# Altium PCB JUNORPCDC.PcbDoc (part 1 of 4)
Units mil, origin at the board's own origin, x right, y up, seen from the top; angles counter-clockwise.
Board outline 12224.75 x 6712.94 mil, 12 copper layers (Top Layer, Internal Plane 1, Signal Layer 1, Internal Plane 2, Internal Plane 3, Signal Layer 2, Internal Plane 4, Signal Layer 3, Internal Plane 5, Signal Layer 4, Internal Plane 6, Bottom Layer), stack 101.97 mil thick; 156 components, 400 nets, 1963 pads, 846 vias.
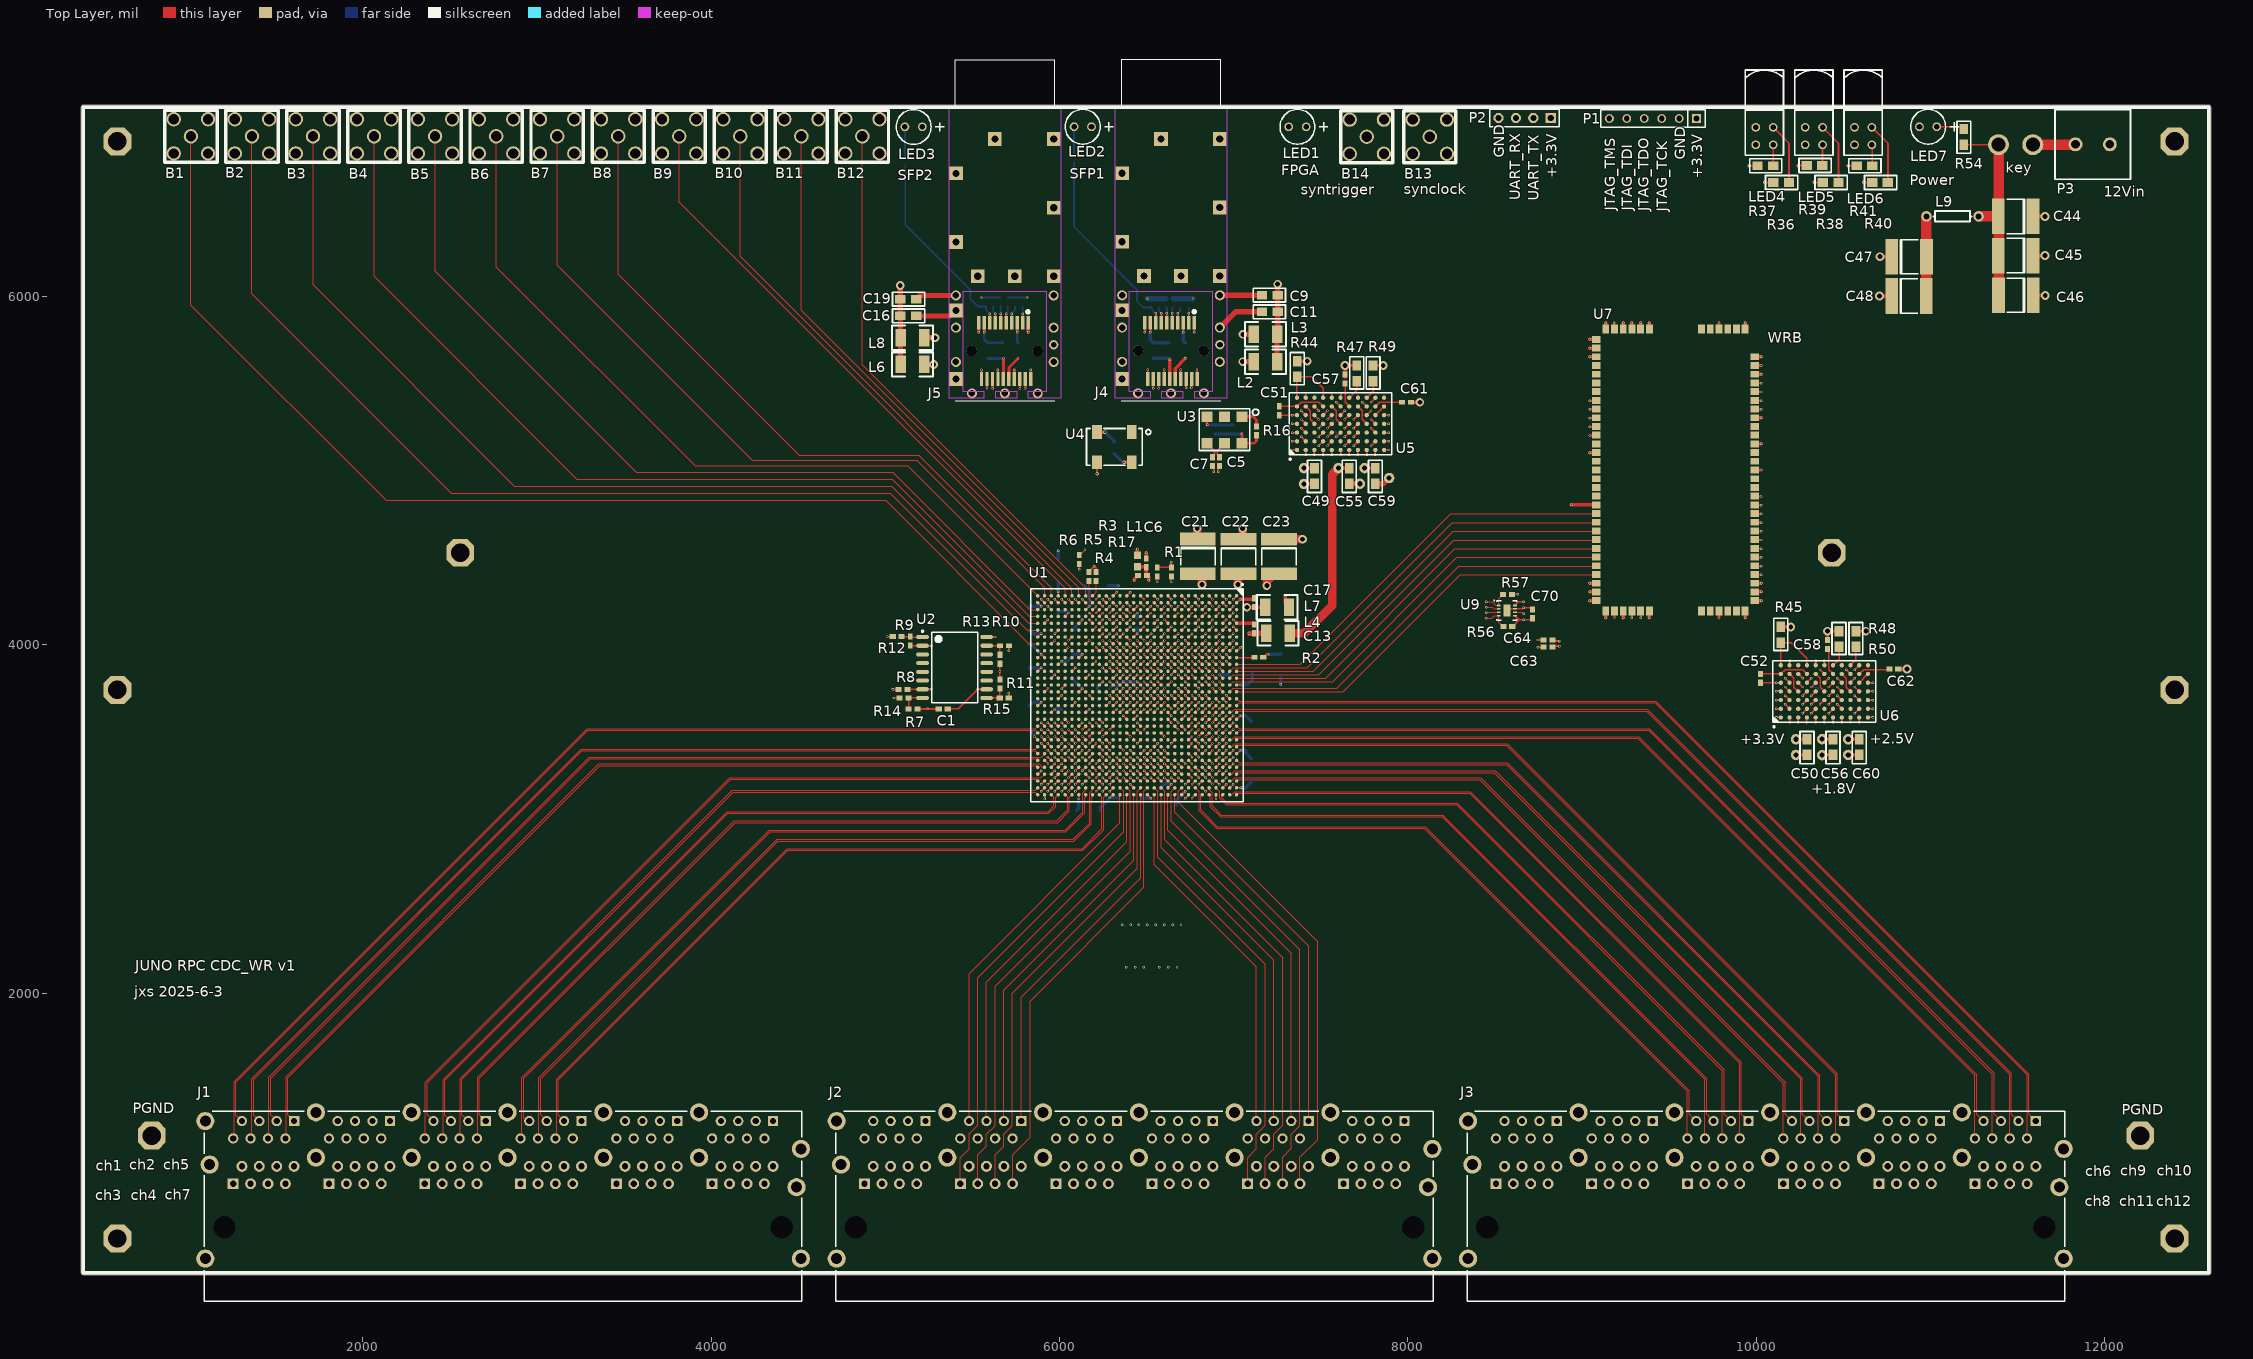
[diagram p0: Top Layer view]
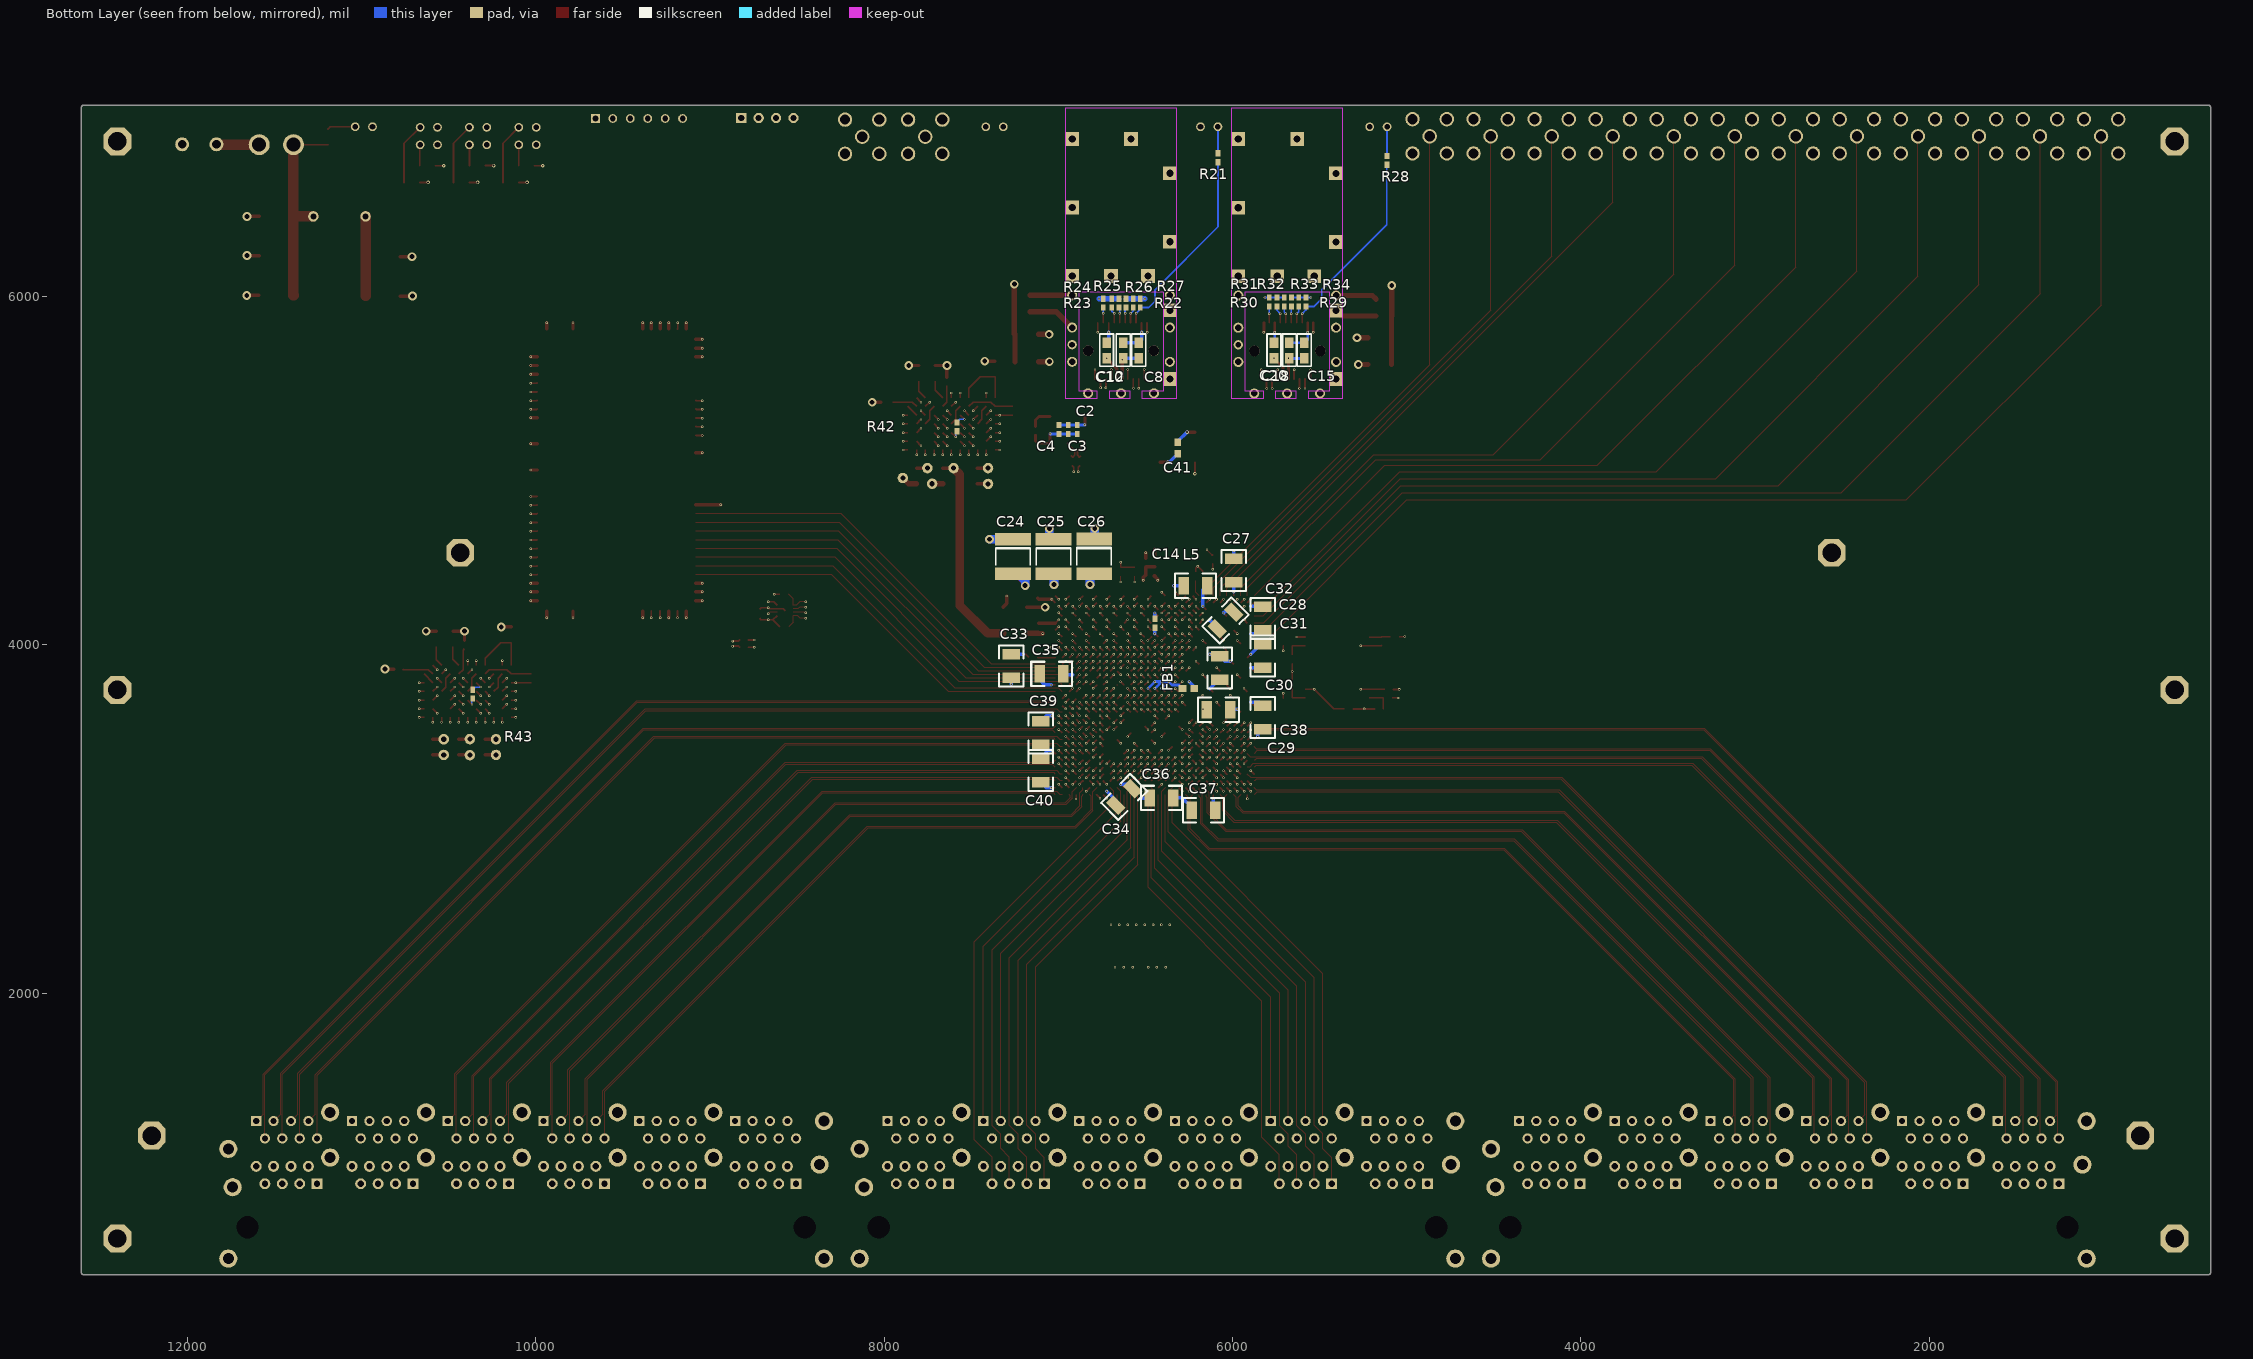
[diagram p1: Bottom Layer view, seen from below]
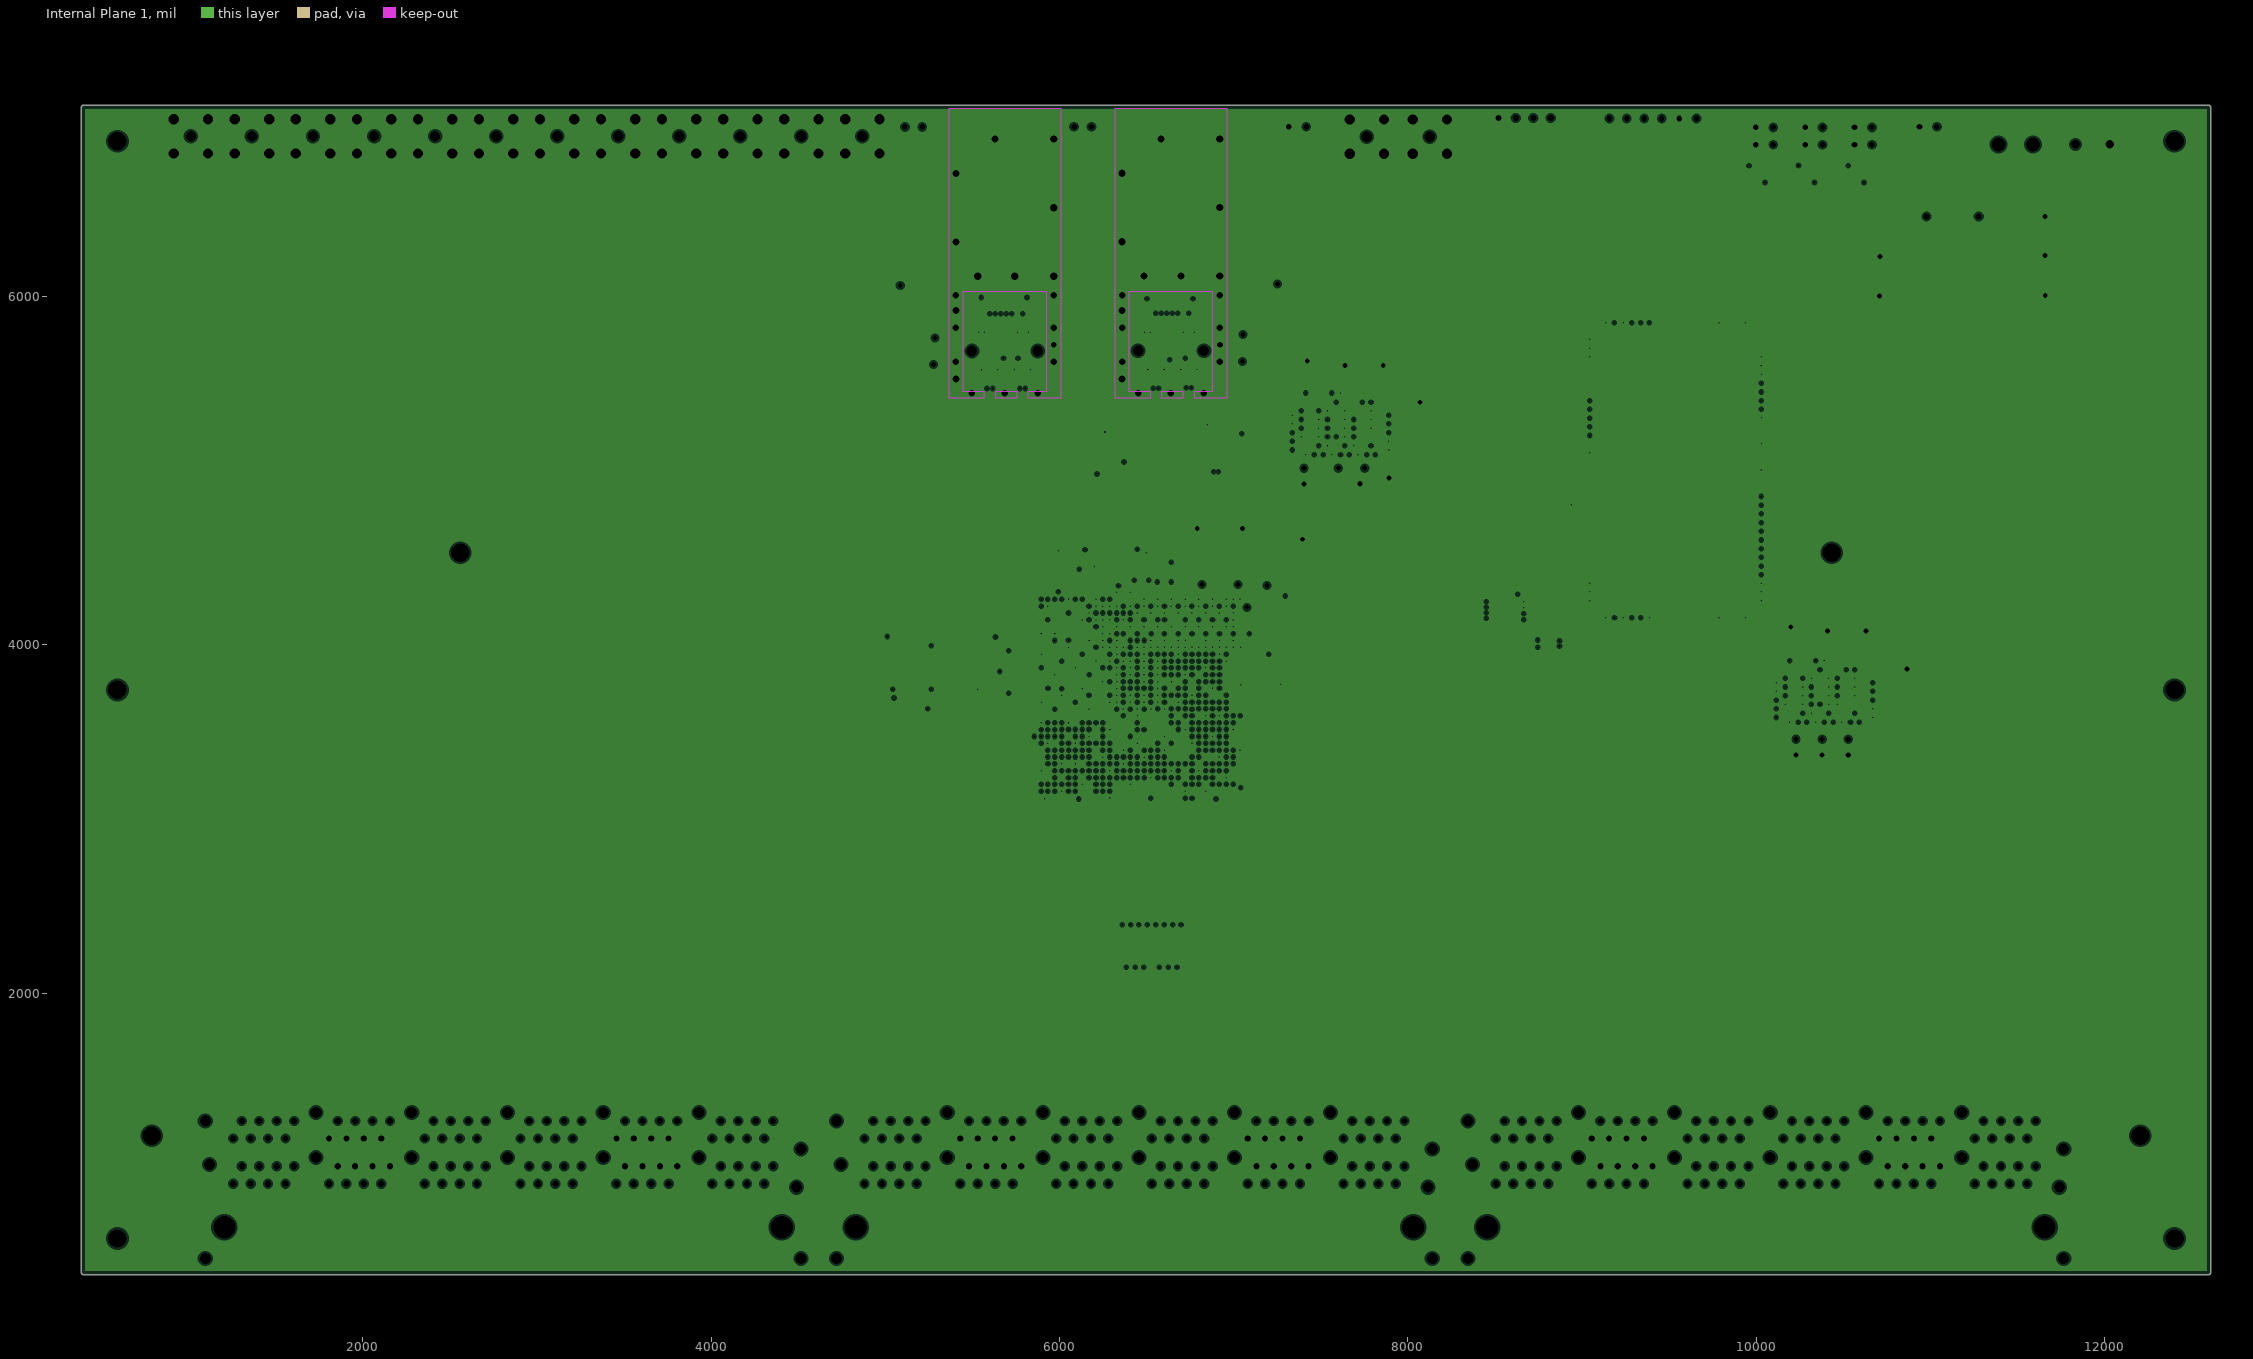
[diagram p2: Internal Plane 1, clearances drawn from the general rule]
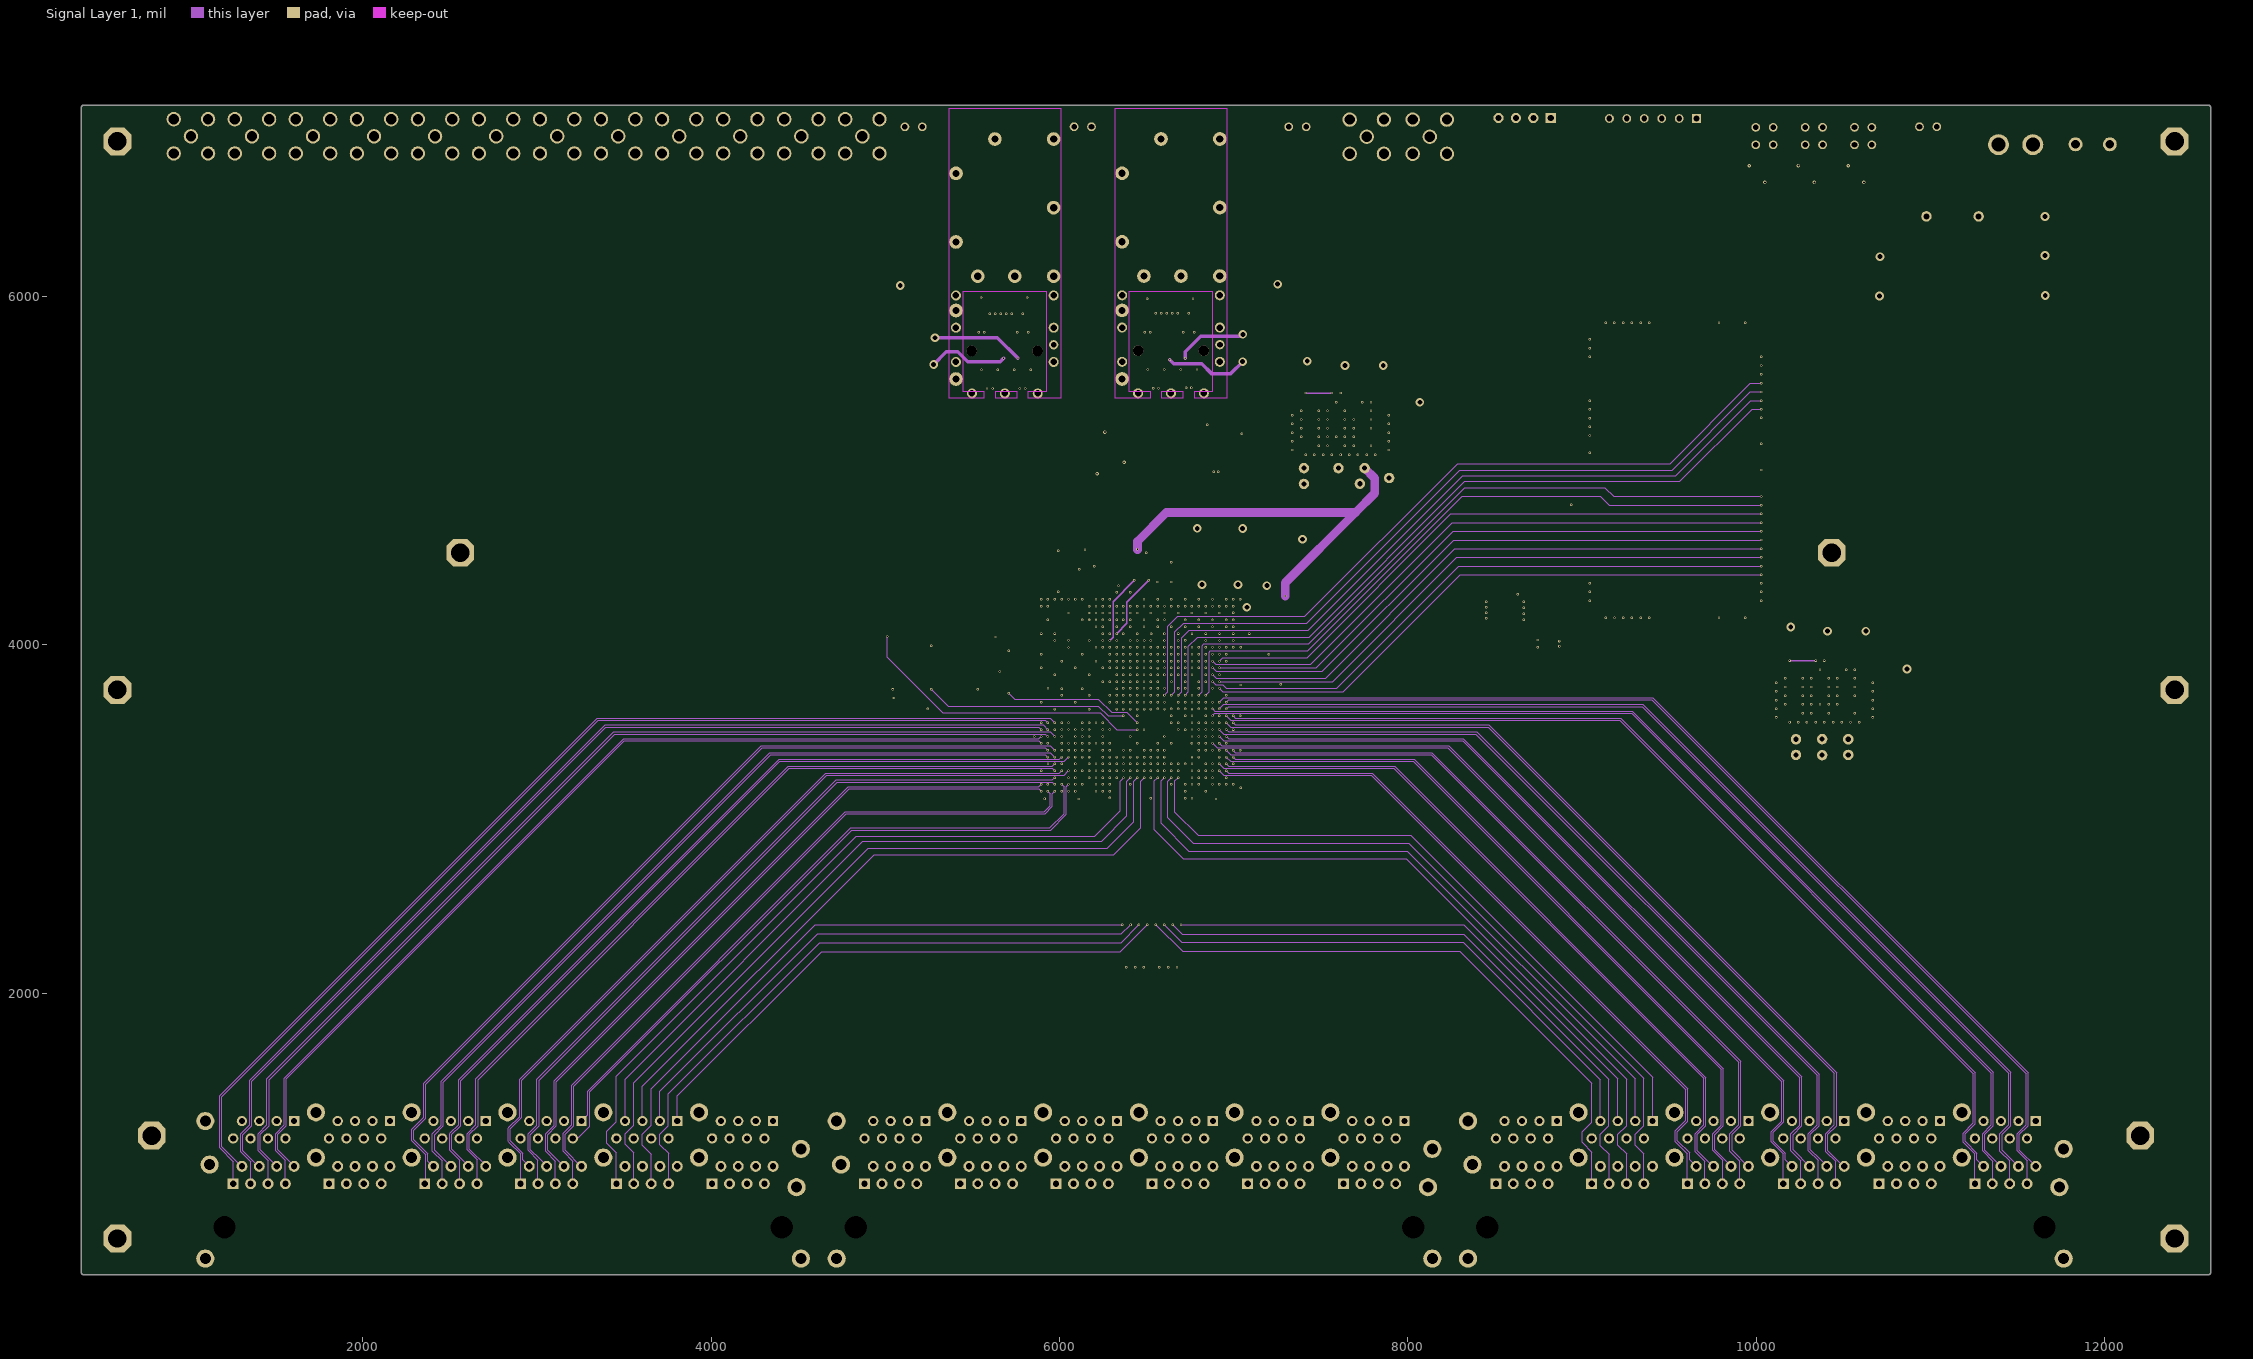
[diagram p3: Signal Layer 1]
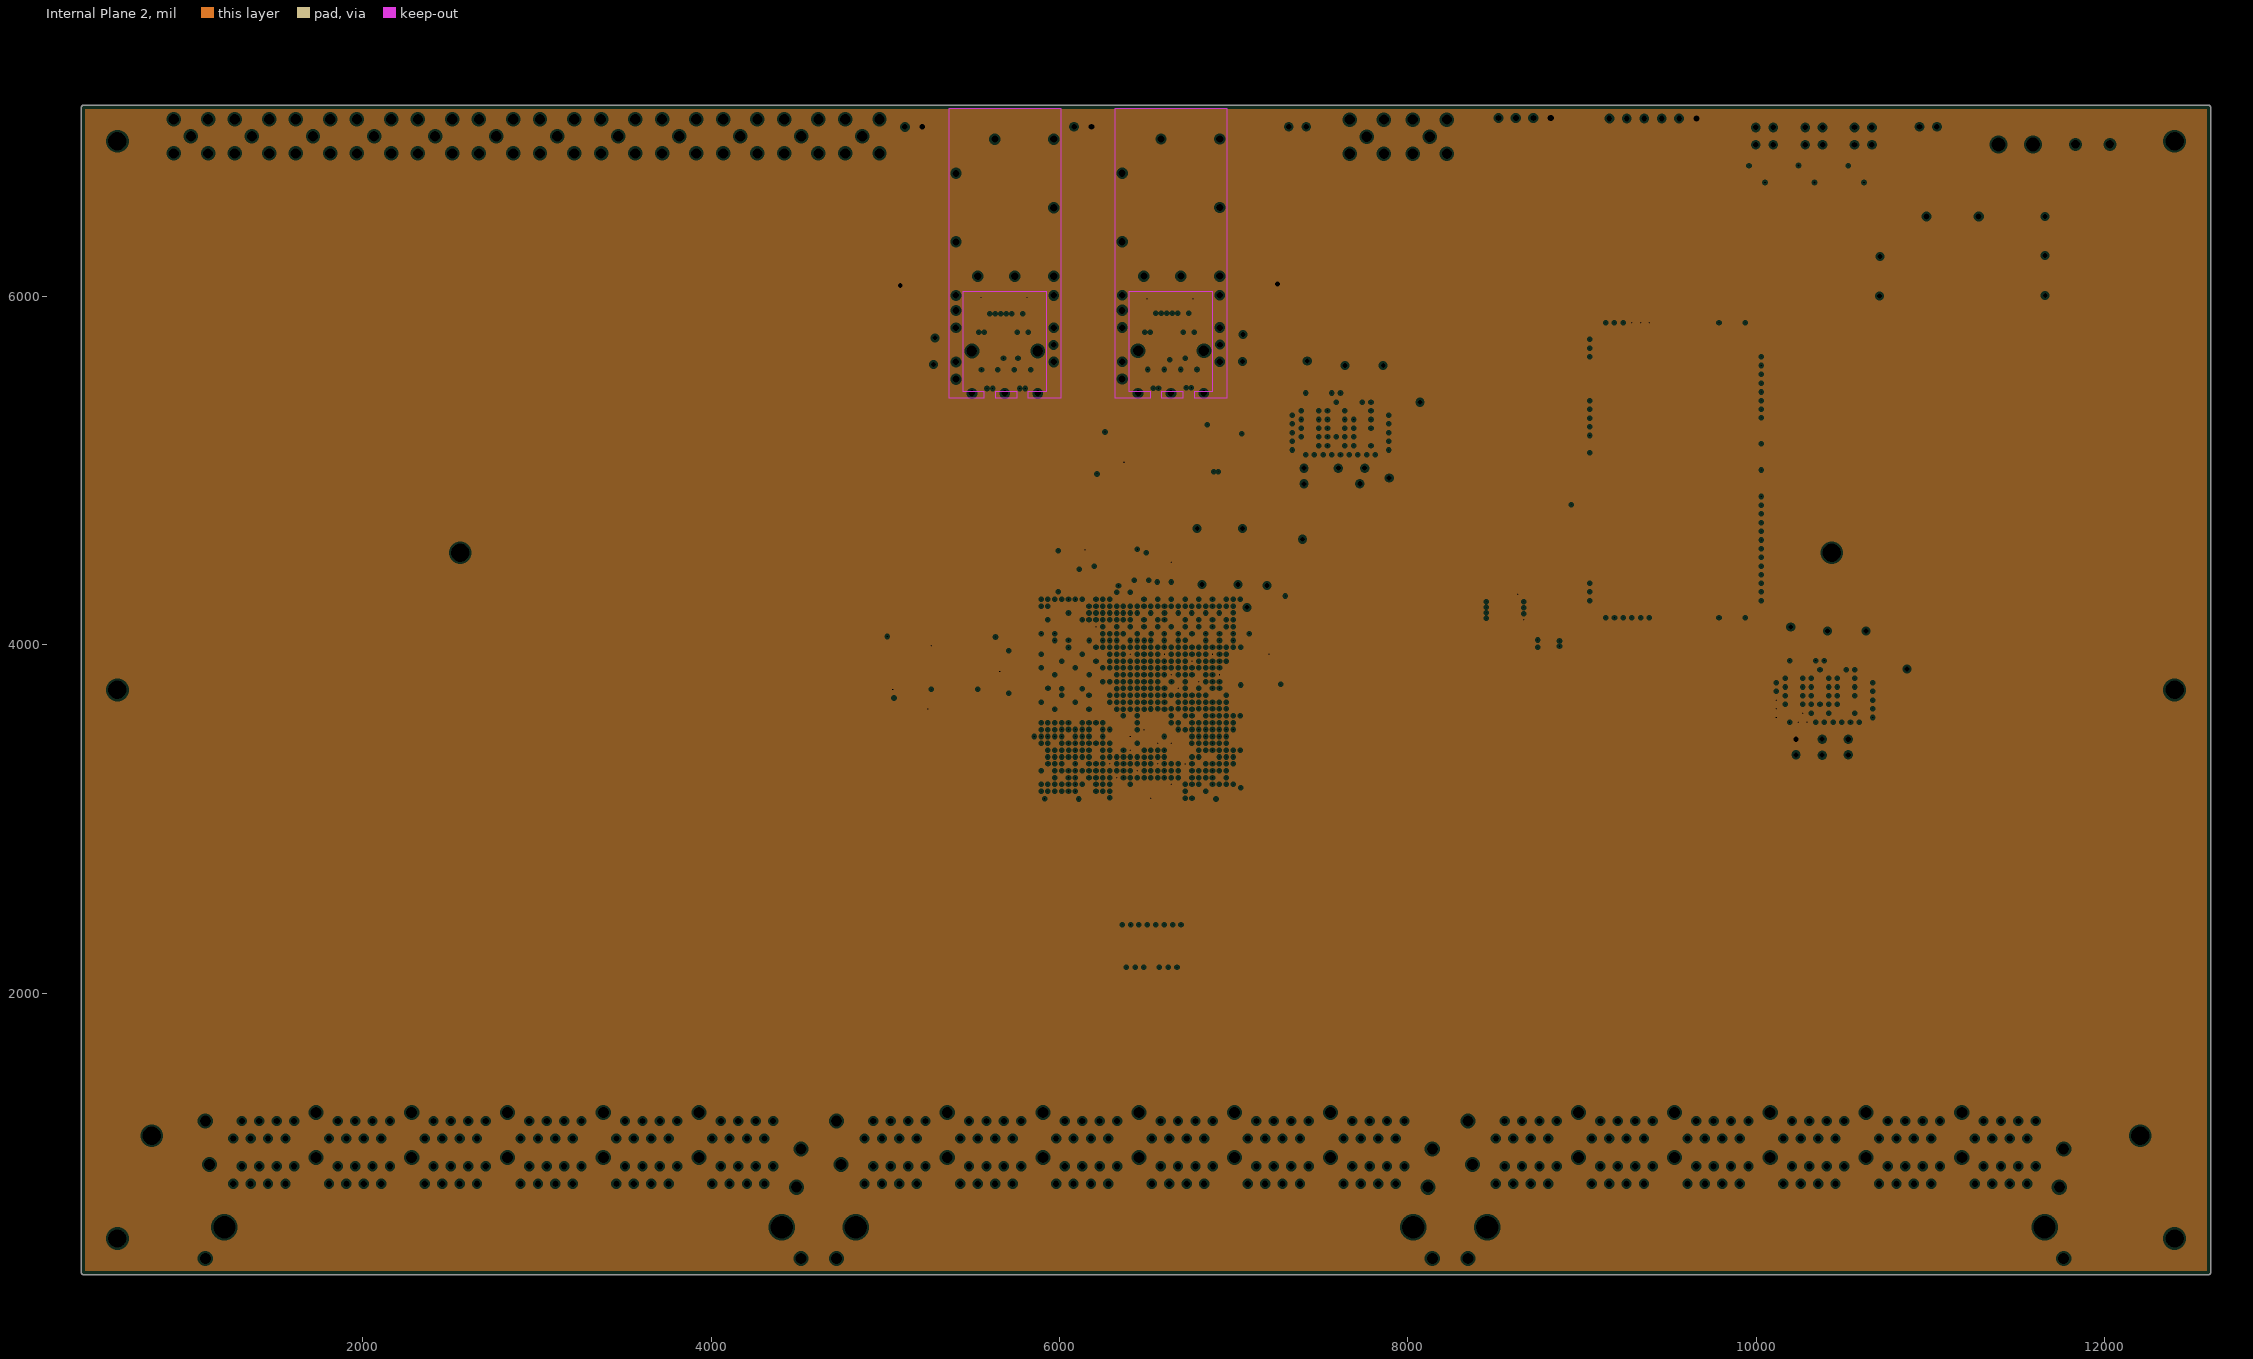
[diagram p4: Internal Plane 2, clearances drawn from the general rule]
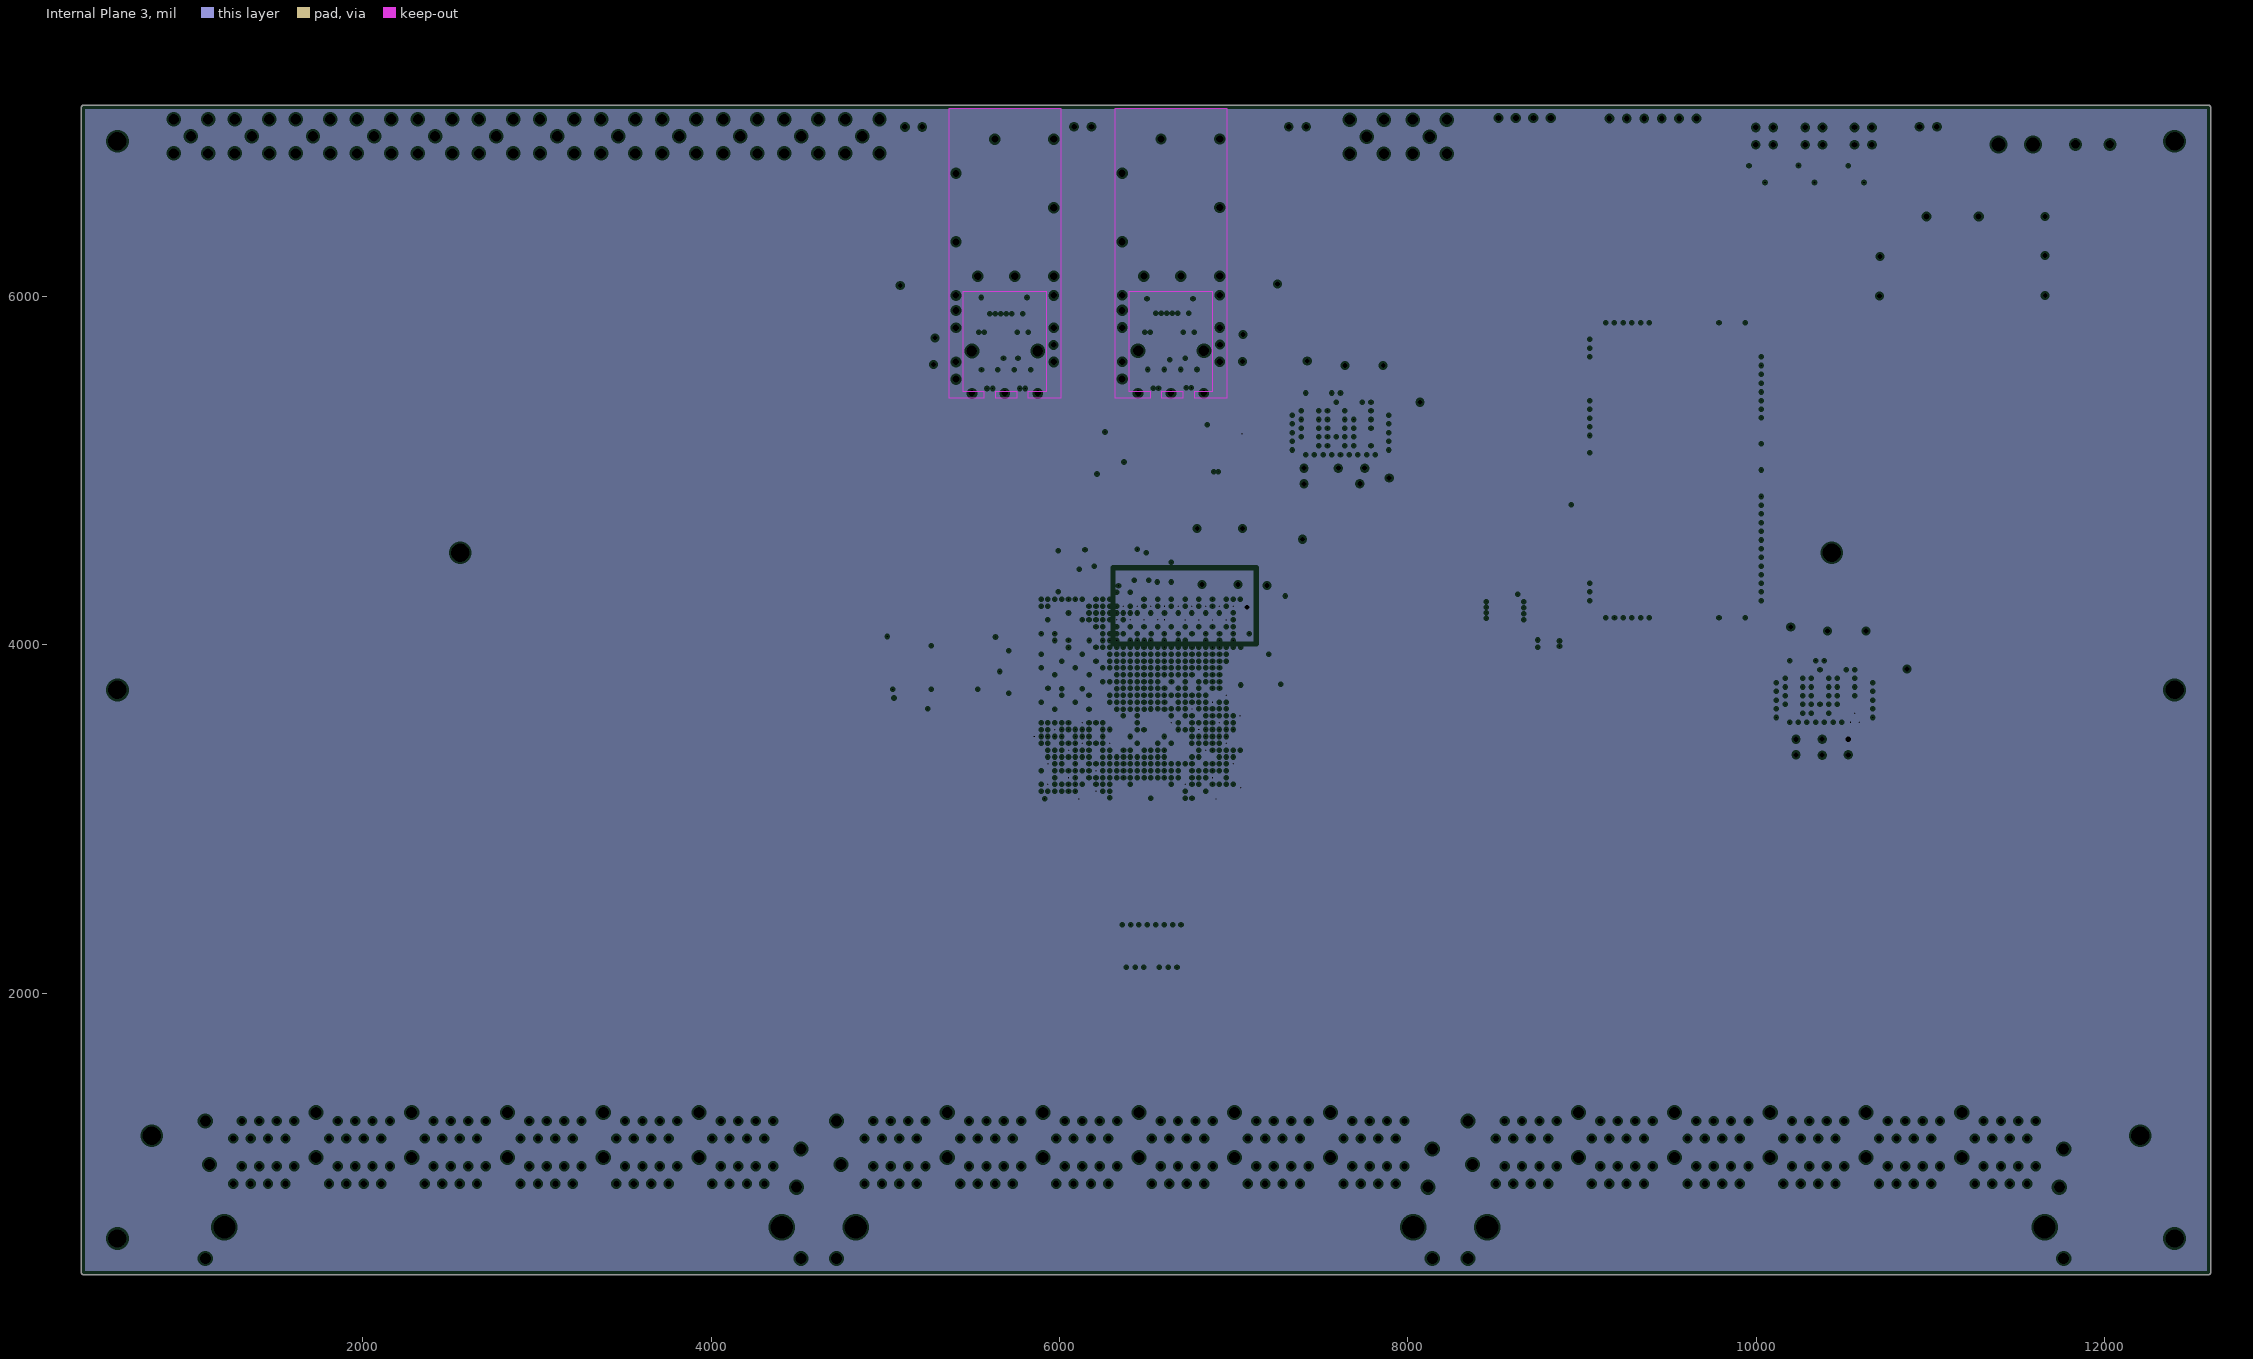
[diagram p5: Internal Plane 3, clearances drawn from the general rule]
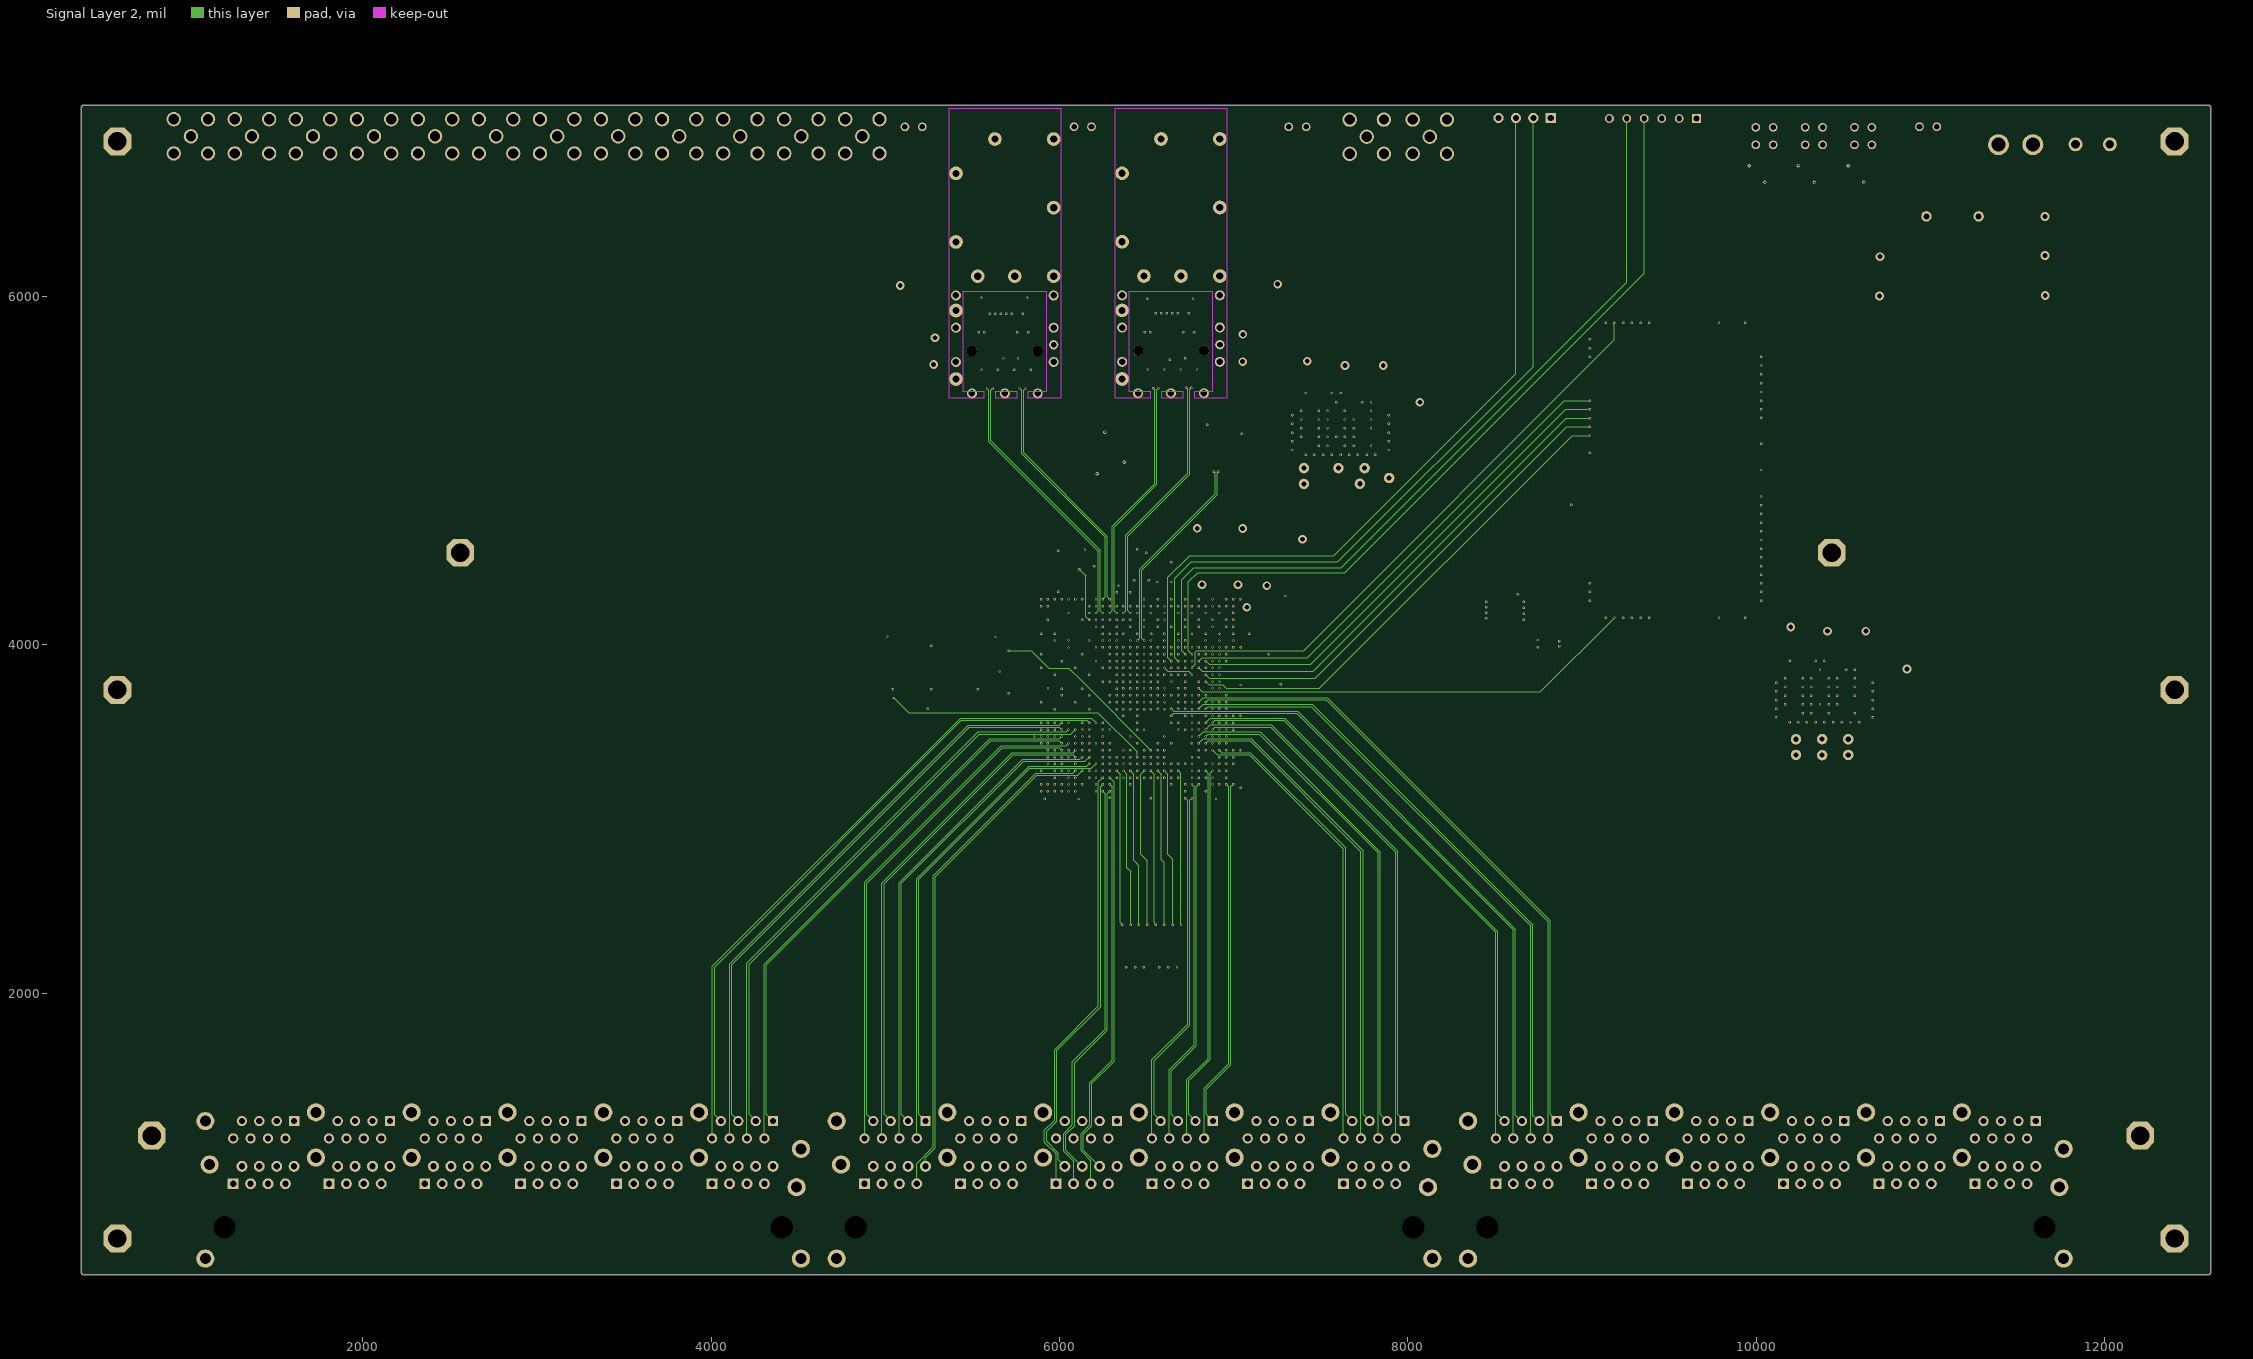
[diagram p6: Signal Layer 2]
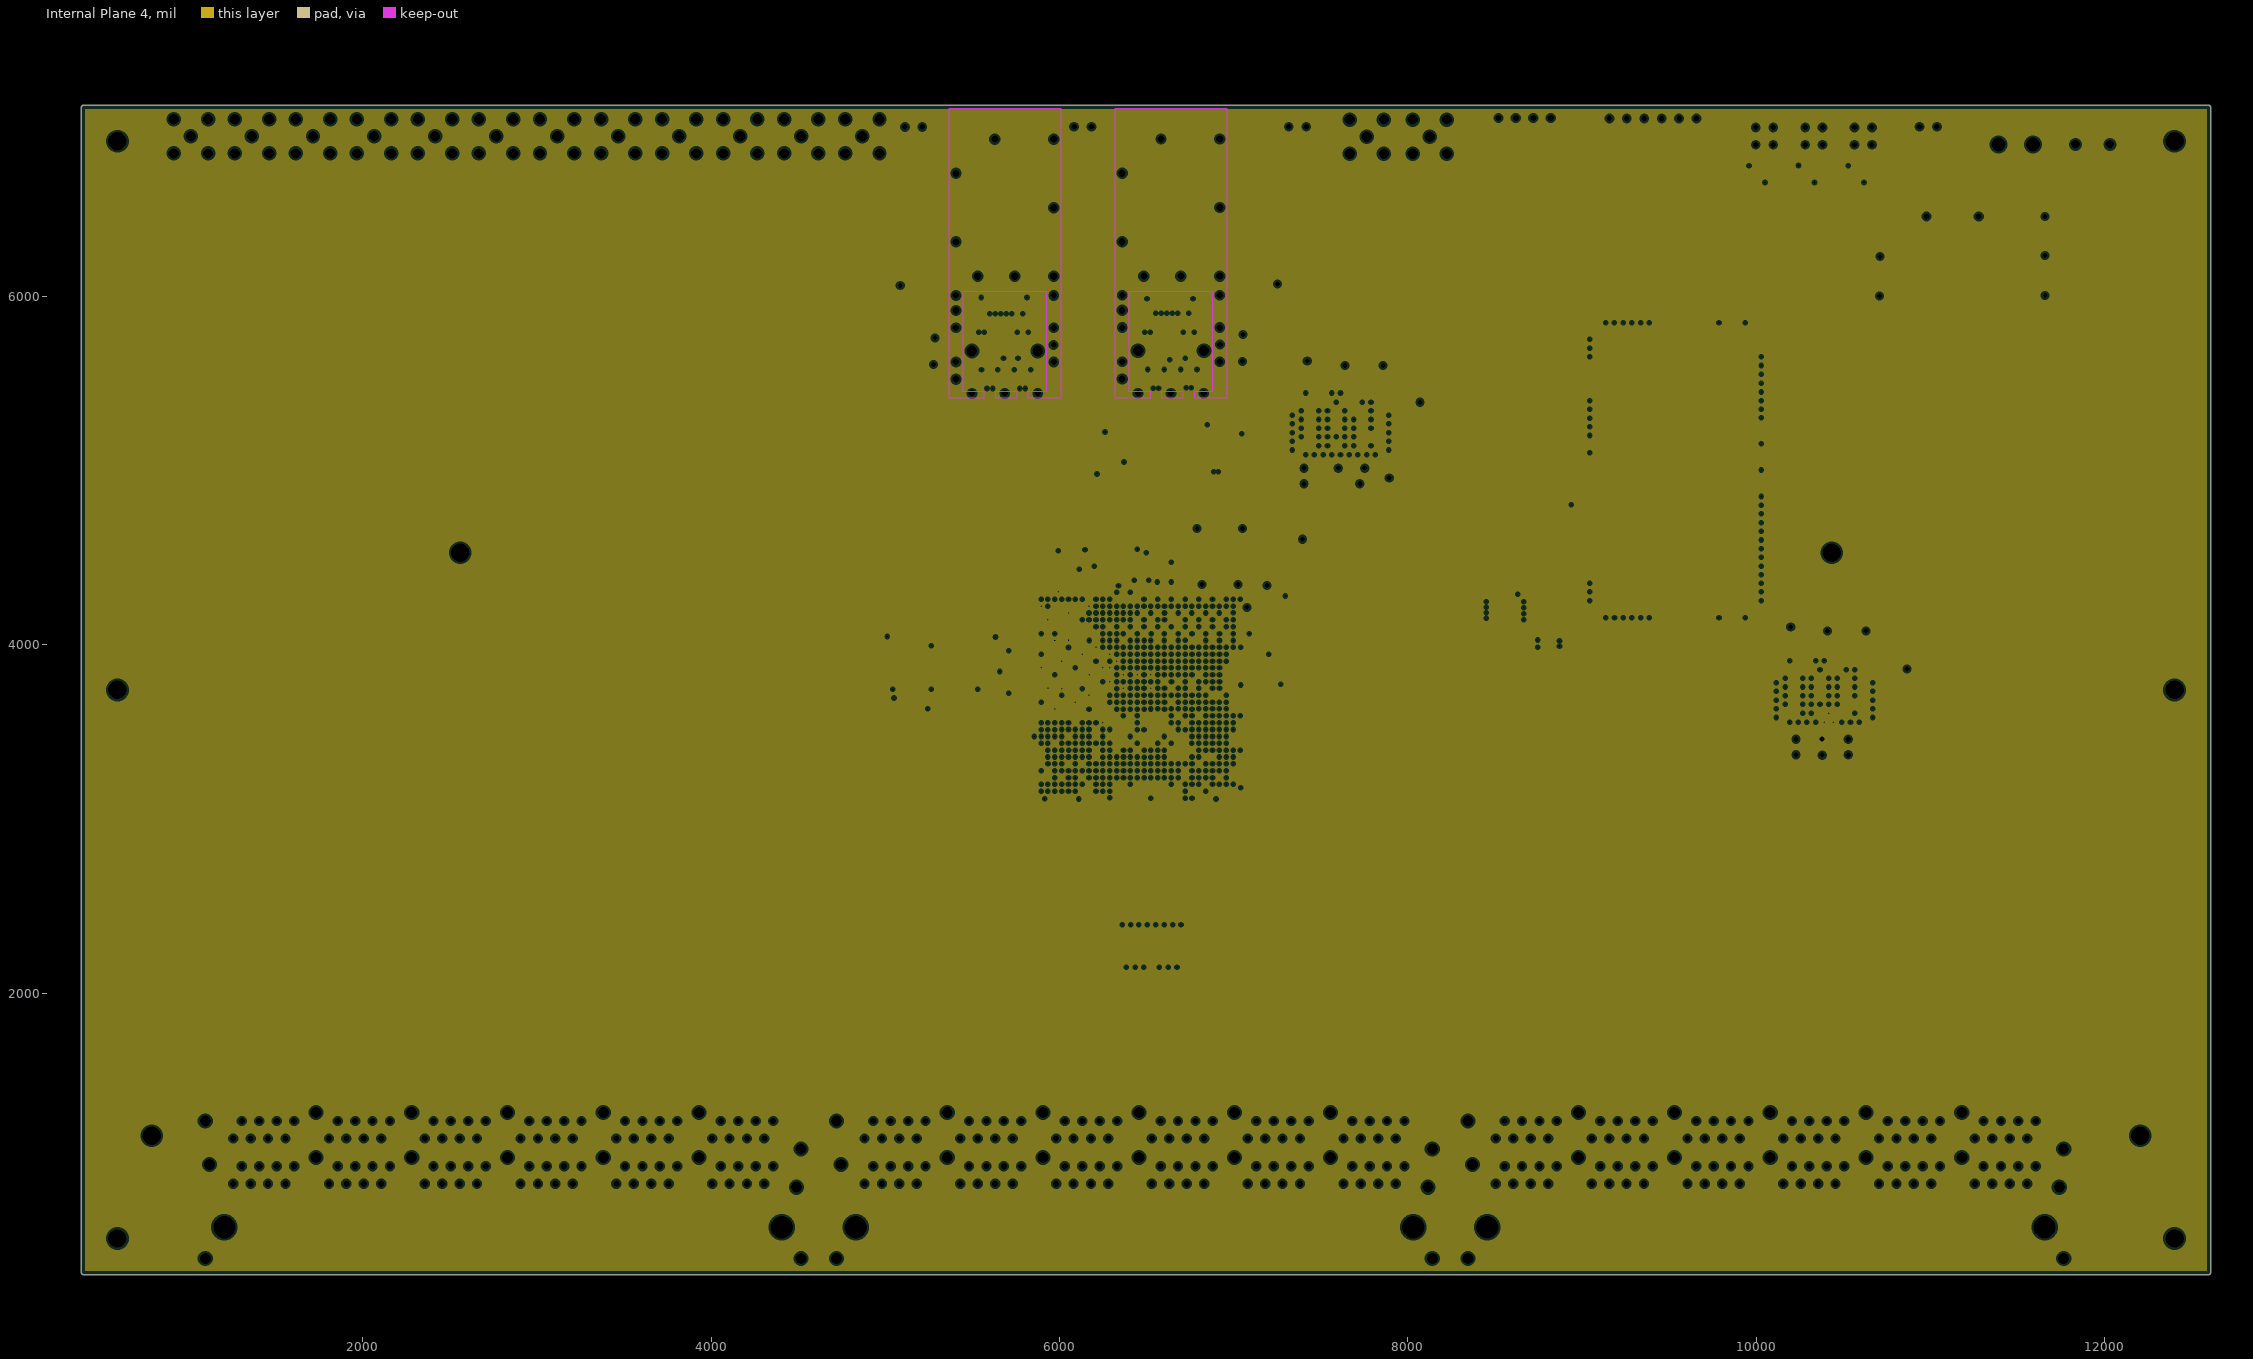
[diagram p7: Internal Plane 4, clearances drawn from the general rule]
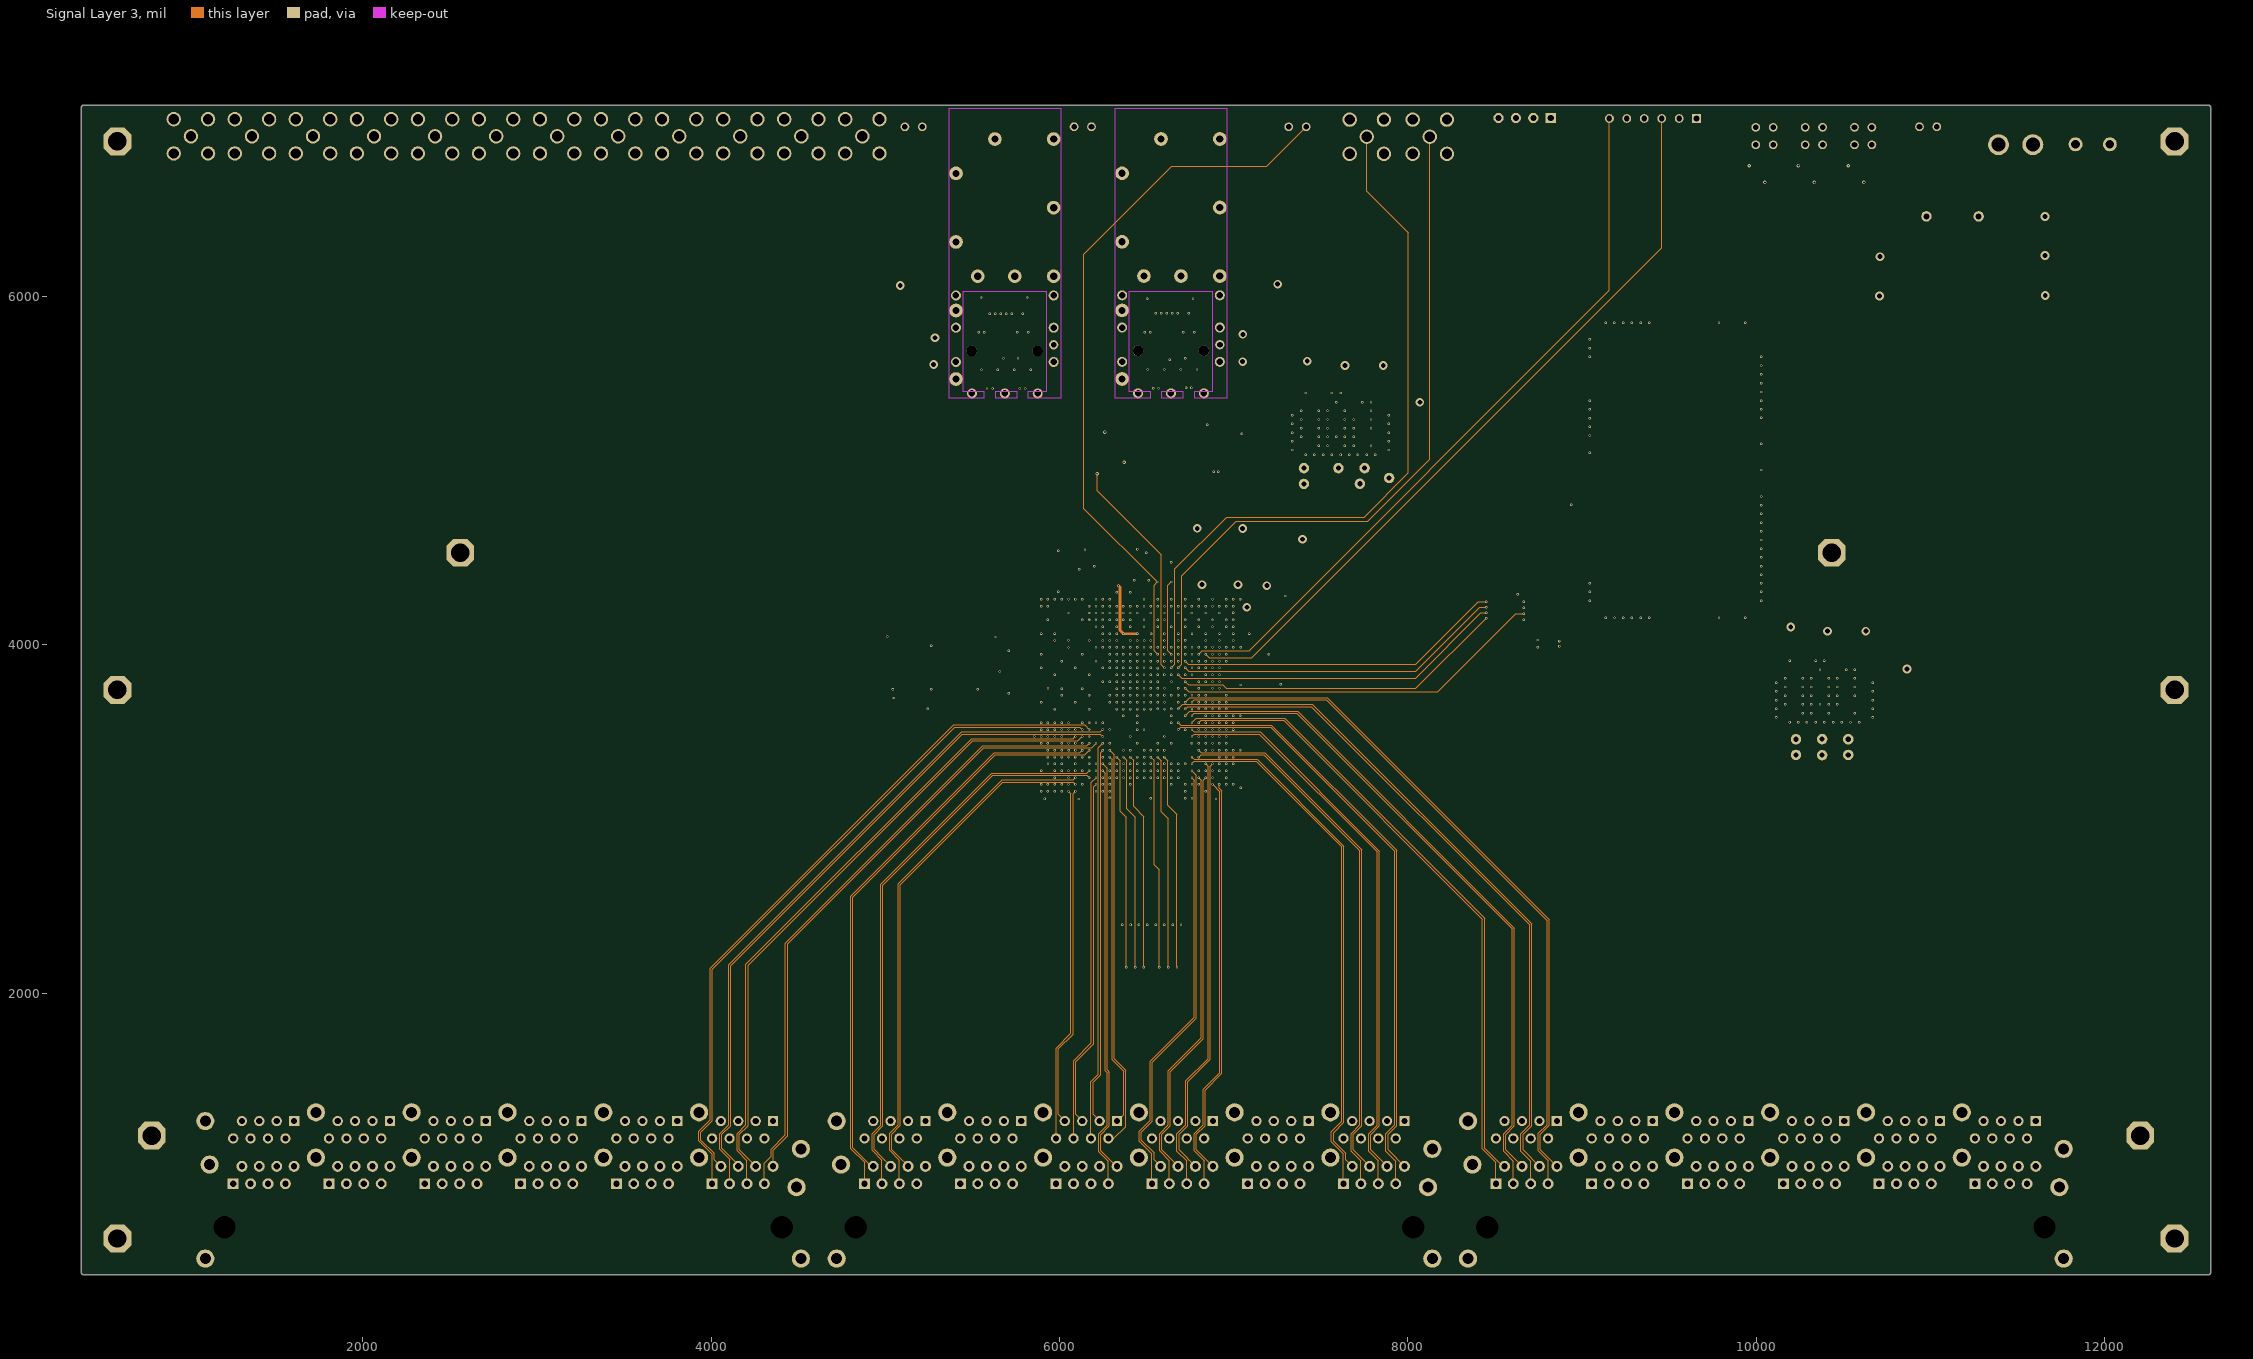
[diagram p8: Signal Layer 3]
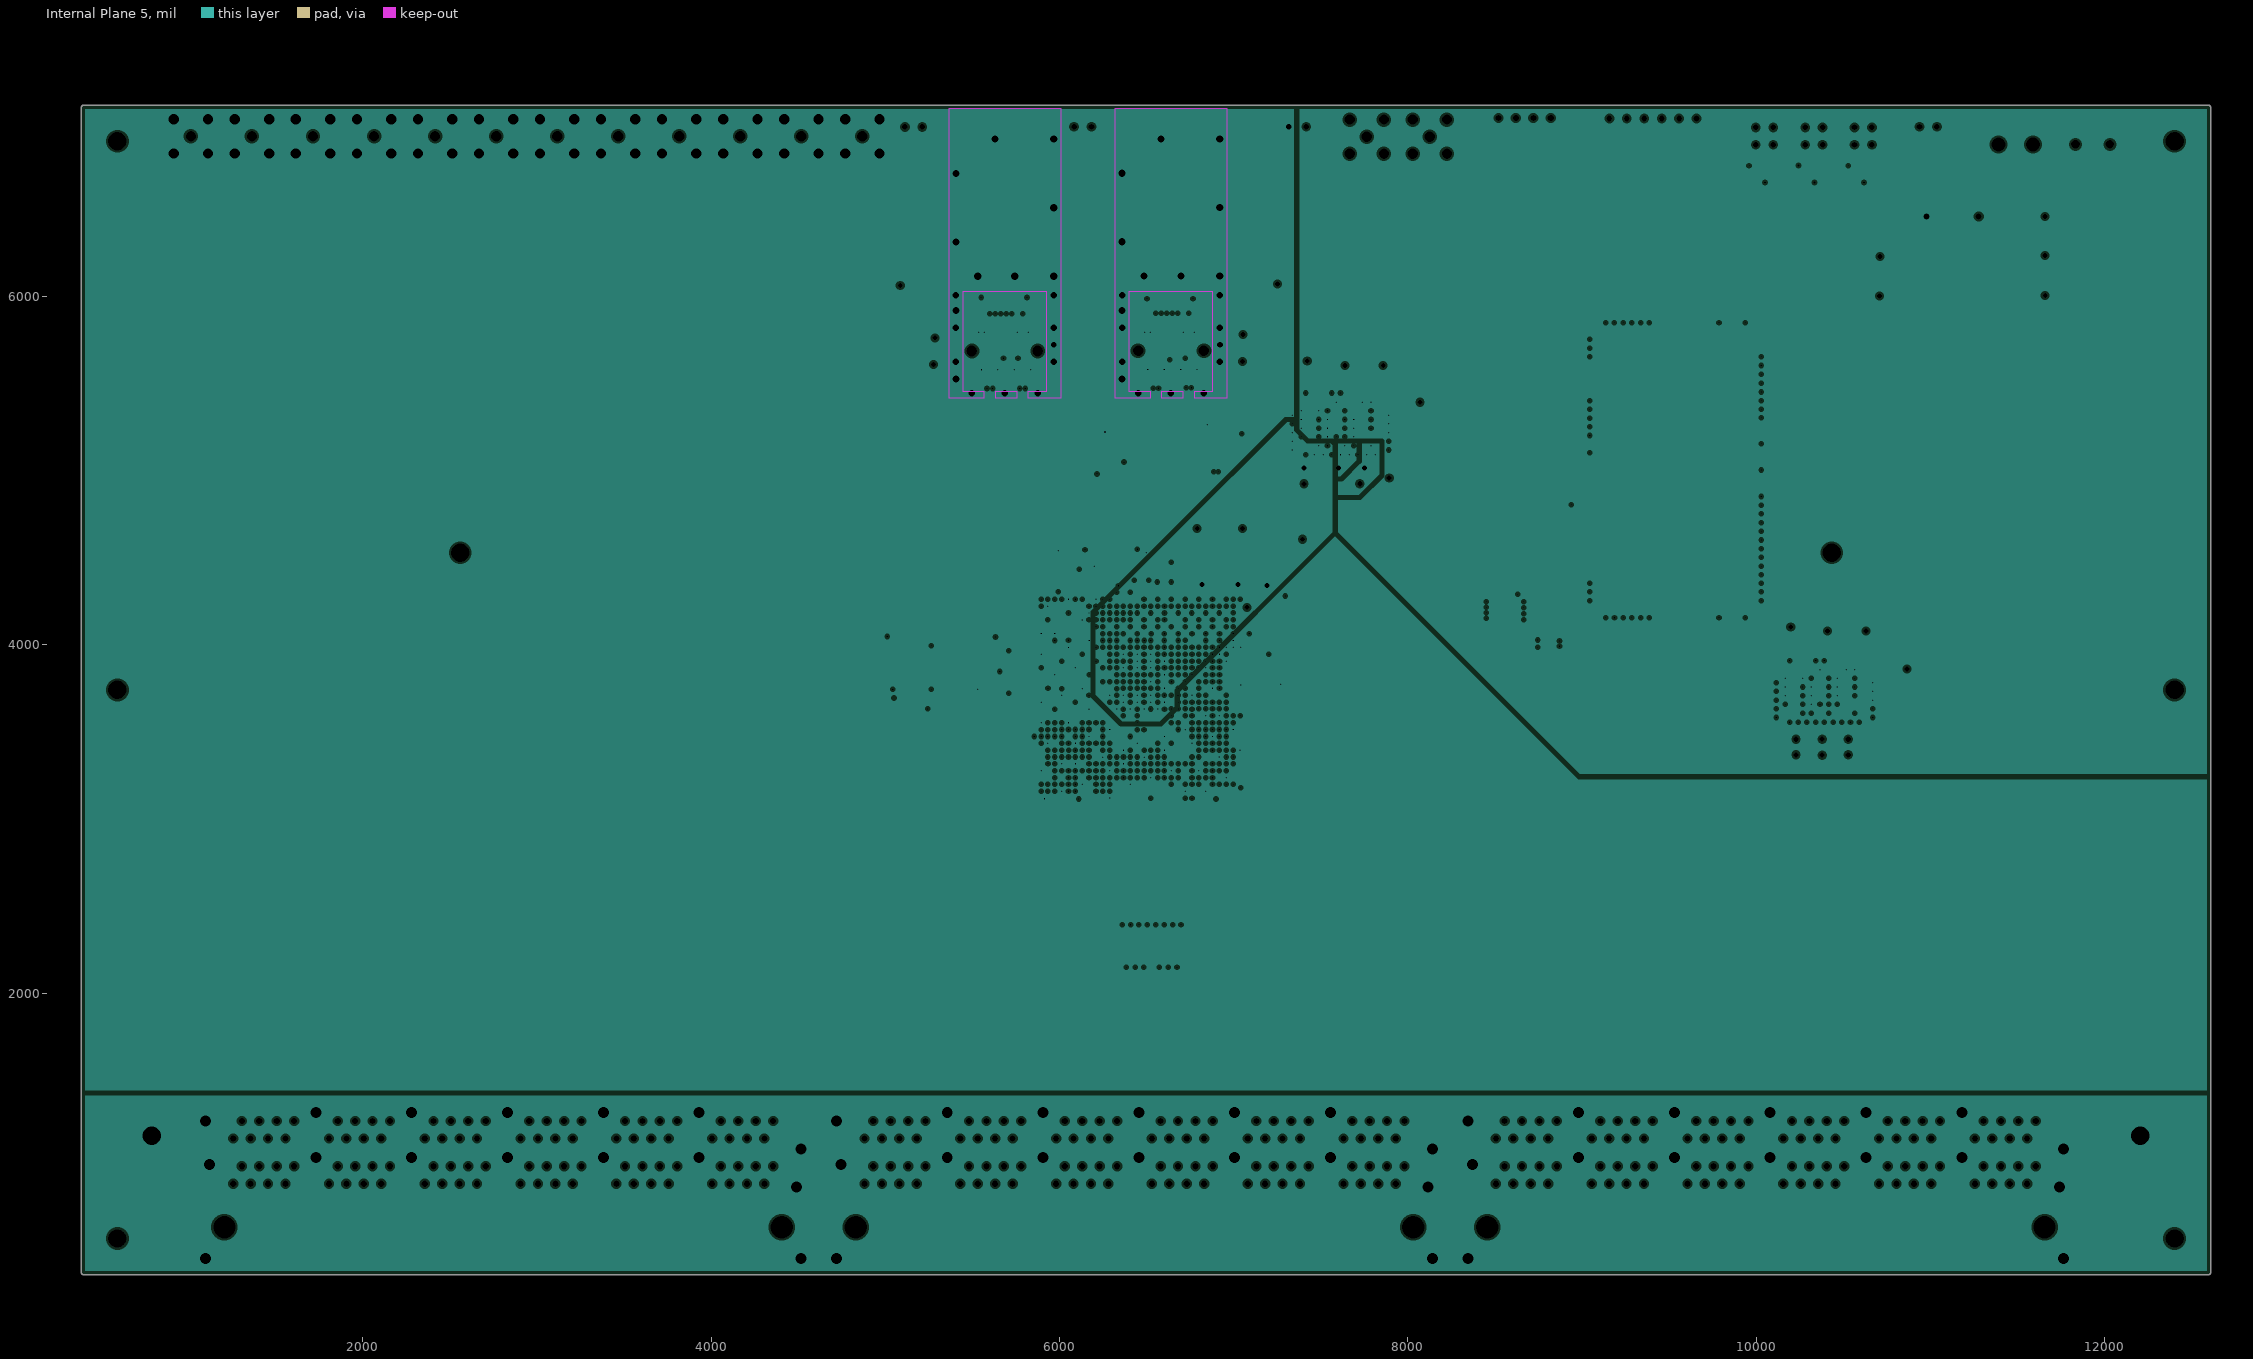
[diagram p9: Internal Plane 5, clearances drawn from the general rule]
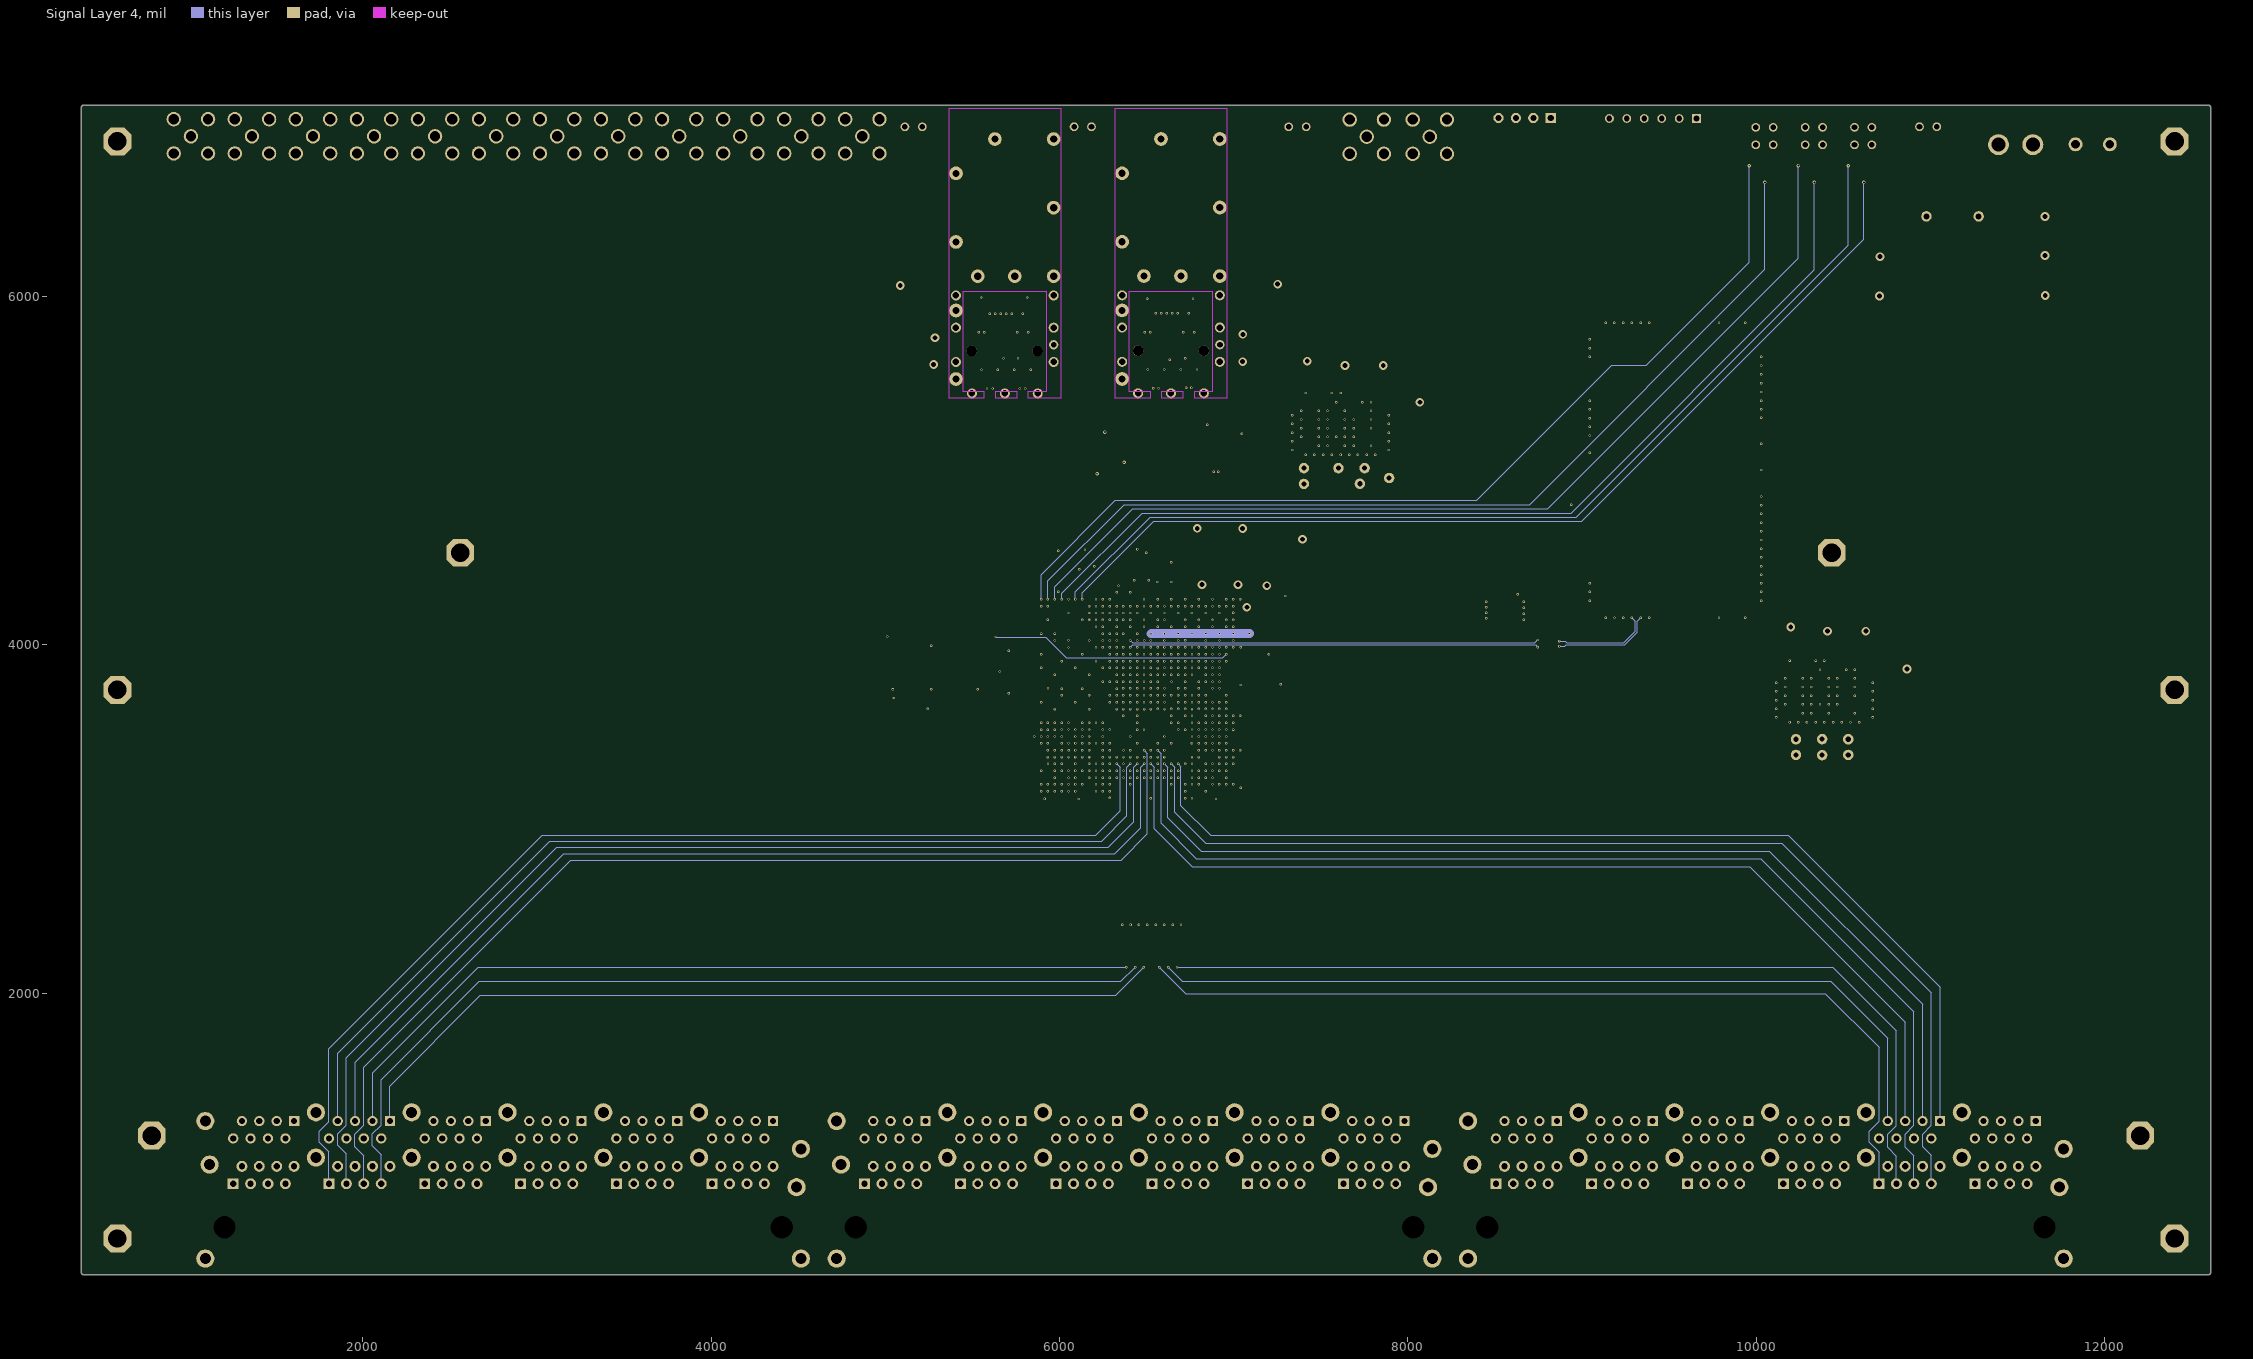
[diagram p10: Signal Layer 4]
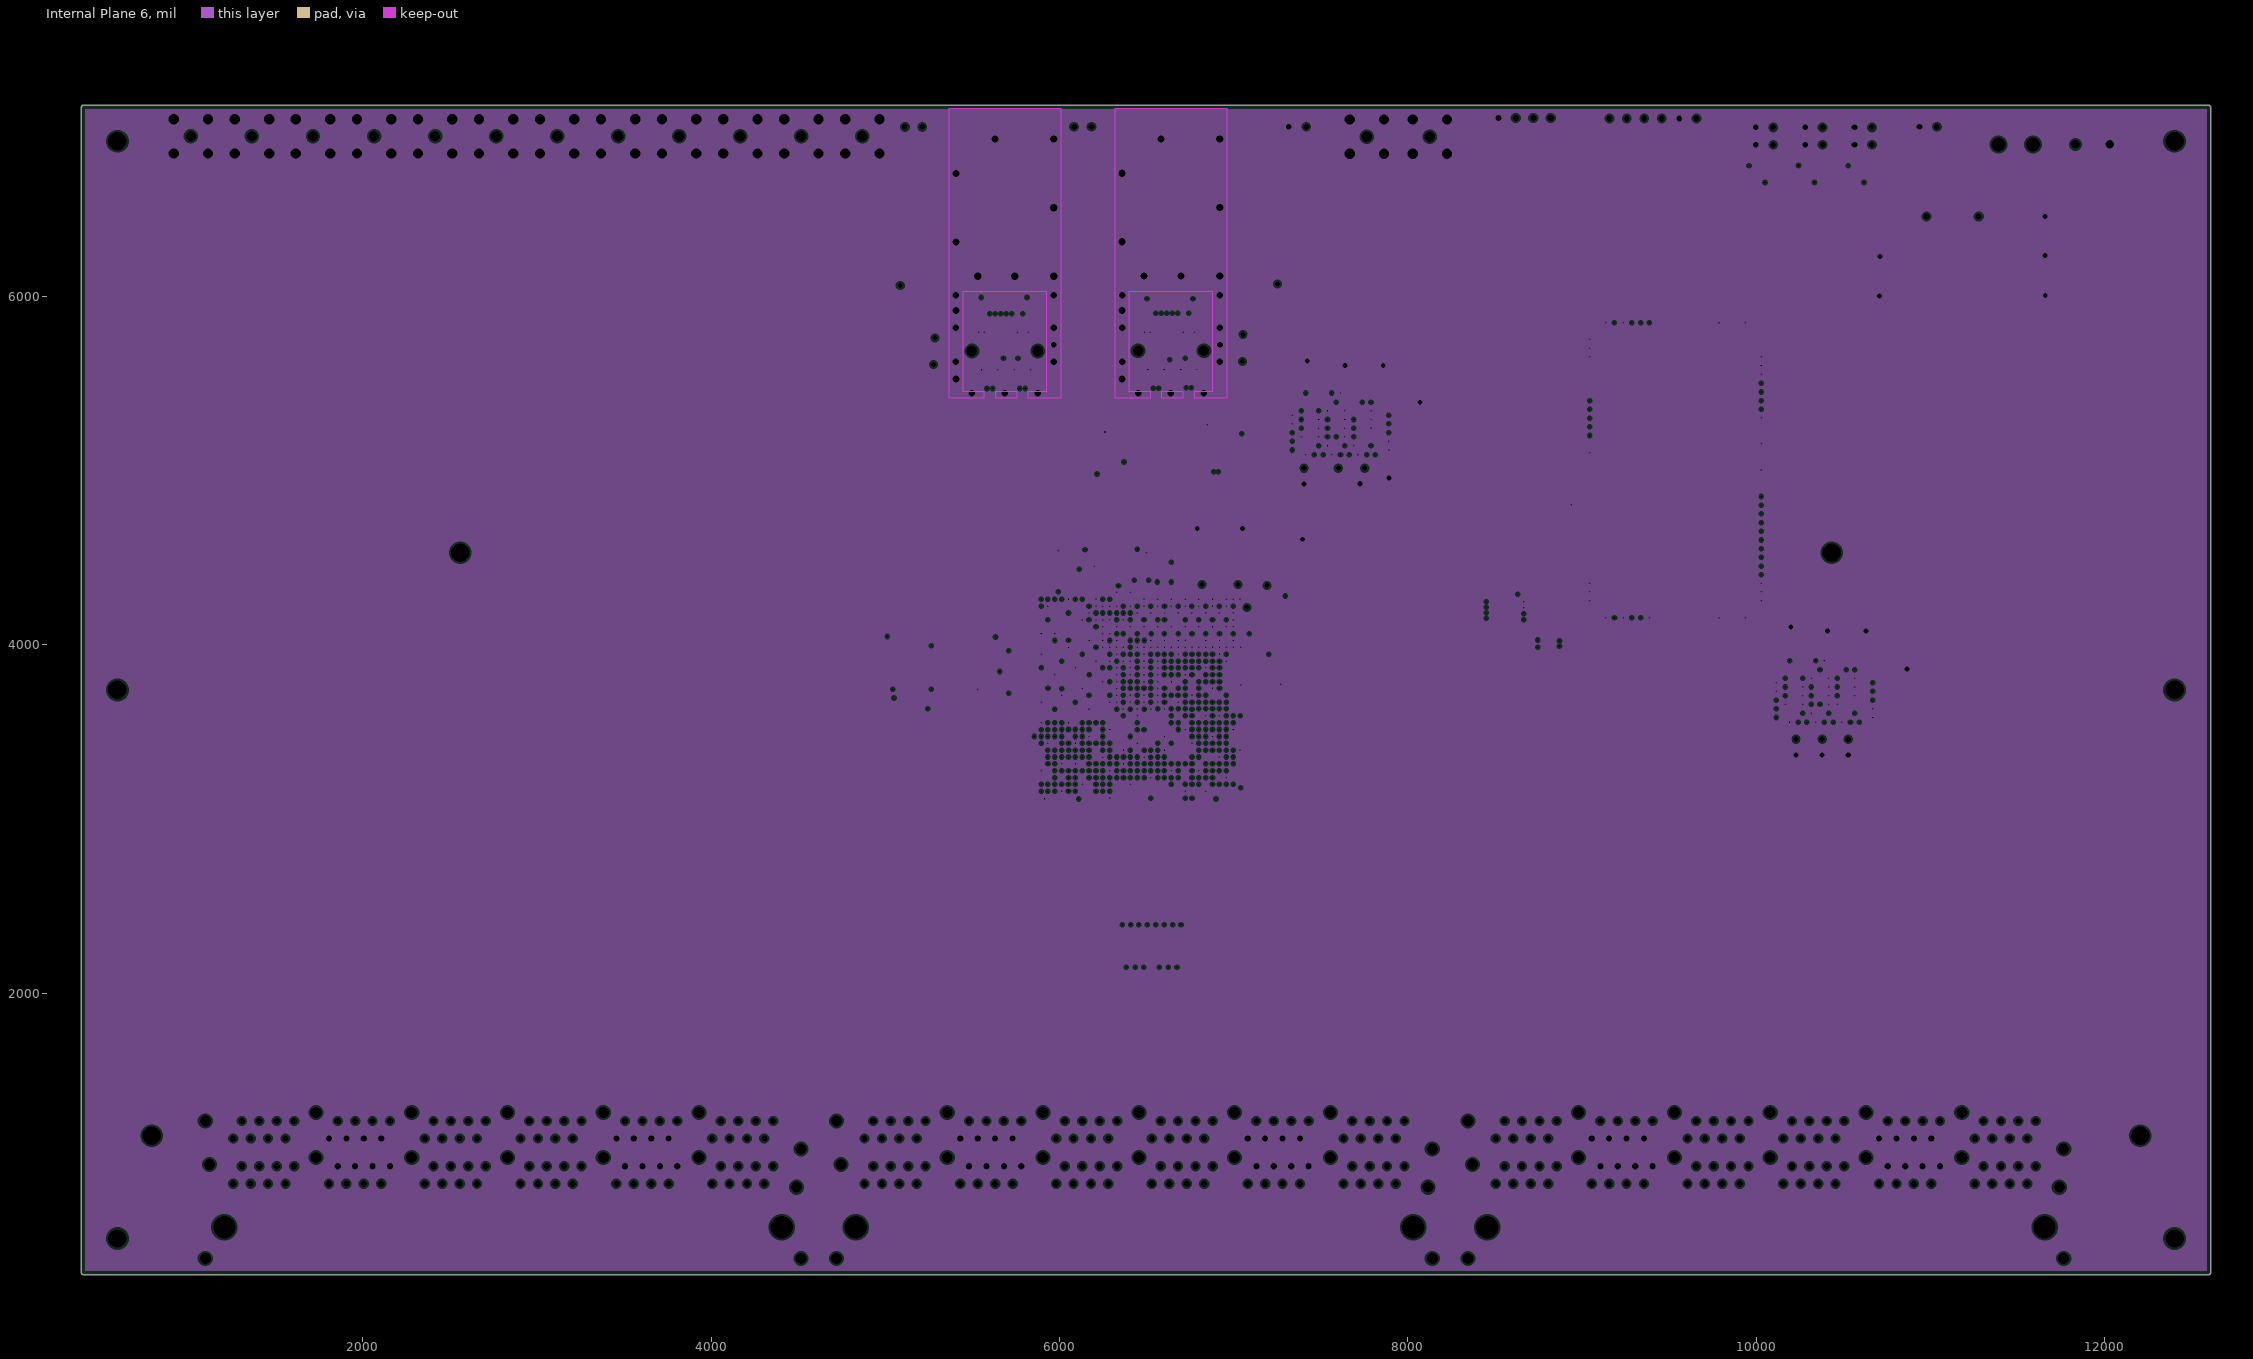
[diagram p11: Internal Plane 6, clearances drawn from the general rule]

## Layer stack, top to bottom
Top Solder: solder mask 0.4, Solder Resist, Dk 3.5
Top Layer: signal copper 1.4
Dielectric 1: core 10, FR-4, Dk 4.2
Internal Plane 1: plane copper 1.417, net GND
Dielectric 3: prepreg 5, Dk 4.2
Signal Layer 1: signal copper 1.417
Dielectric 4: core 10, Dk 4.2
Internal Plane 2: plane copper 1.417, net +3.3Vd
Dielectric 6: prepreg 5, Dk 4.2
Internal Plane 3: plane copper 1.417, net (Multiple Nets)
Dielectric 11: core 10, Dk 4.2
Signal Layer 2: signal copper 1.417
Dielectric 10: prepreg 5, Dk 4.2
Internal Plane 4: plane copper 1.417, net +1.8Vd
Dielectric 12: core 10, Dk 4.2
Signal Layer 3: signal copper 1.417
Dielectric 15: prepreg 5, Dk 4.2
Internal Plane 5: plane copper 1.417, net (Multiple Nets)
Dielectric 16: core 10, Dk 4.2
Signal Layer 4: signal copper 1.417
Dielectric 17: prepreg 5, Dk 4.2
Internal Plane 6: plane copper 1.417, net GND
Dielectric 14: core 10, Dk 4.2
Bottom Layer: signal copper 1.4
Bottom Solder: solder mask 0.4, Solder Resist, Dk 3.5

## Board outline
393.7,383.69 cw(c393.7,393.7) 383.69,393.7 383.69,7086.61 cw(c393.7,7086.61) 393.7,7096.63 12598.43,7096.63 cw(c12598.43,7086.61) 12608.44,7086.61 12608.44,393.7 cw(c12598.43,393.7) 12598.43,383.69

## Design rules (kind name [scope] priority, off if disabled: settings)
Clearance [All] p1: gap=0 ignorepadtopadclearanceinfootprint=FALSE
ComponentClearance [All] p1: gap=0 collisioncheckmode=3 verticalgap=0 showdistances=FALSE
DiffPairsRouting [All] p1: maxlimit=10 minlimit=4 mostfreqgap=8 toplayer_prefgap=6 toplayer_minwidth=4 toplayer_maxwidth=10 toplayer_prefwidth=4 midlayer1_minwidth=4 midlayer1_maxwidth=10 midlayer1_prefwidth=4 midlayer2_minwidth=4 midlayer2_maxwidth=10 midlayer2_prefwidth=4 midlayer3_minwidth=4 midlayer3_maxwidth=10 midlayer3_prefwidth=4 midlayer4_minwidth=4 midlayer4_maxwidth=10 midlayer4_prefwidth=4 bottomlayer_prefgap=6 bottomlayer_minwidth=4 bottomlayer_maxwidth=10 bottomlayer_prefwidth=4 maxuncoupledlength=500
Height [All] p1: minheight=0 maxheight=3937.01 prefheight=500
HoleSize [All] p1: absolutevalues=TRUE maxlimit=300 minlimit=1 maxpercent=80.000 minpercent=20.000
HoleToHoleClearance [All] p1: gap=0 allowstackedmicrovias=TRUE
MinimumSolderMaskSliver [All] p1: minsoldermaskwidth=0
PlaneClearance [All] p1: clearance=12
PlaneConnect [All] p1: planeconnectstyle=Direct reliefexpansion=20 reliefentries=4 reliefconductorwidth=10 reliefairgap=10
PolygonConnect [All] p1: connectstyle=Relief reliefconductorwidth=10 reliefentries=4 polygonreliefangle="90 Angle" airgapwidth=10
RoutingVias [All] p1: holewidth=28 width=50 viastyle="Through Hole" minholewidth=6 minwidth=10 maxholewidth=200 maxwidth=300
SilkToSilkClearance [All] p1: silktosilkclearance=0
SilkToSolderMaskClearance [IsPad] p1: minsilkscreentomaskgap=0 clearancetoexposedcopper=TRUE
SolderMaskExpansion [All] p1: expansion=4
Width [All] p1: maxlimit=100 minlimit=4 preferedwidth=10 minimp=50.000000 maximp=50.000000 favimp=50.000000
20 further rules are at their usual default settings.

## Classes and differential pairs
component class WR: P2 U7
component class power: C44 C45 C46 C47 C48 C49 C50 C51 C52 C55 C56 C57 C58 C59 C60 C61 C62 L9 LED7 P3 R42 R43 R44 R45 R47 R48 R49 R50 R54 U5 U6
component class main: B1 B2 B3 B4 B5 B6 B7 B8 B9 B10 B11 B12 B13 B14 C41 LED4 LED5 LED6 R36 R37 R38 R39 R40 R41 U4
component class K7410tFFG900Power: C21 C22 C23 C24 C25 C26 C27 C28 C29 C30 C31 C32 C33 C34 C35 C36 C37 C38 C39 C40
component class K7410tFFG900MGT: C2 C3 C4 C5 C6 C7 C8 C9 C10 C11 C12 C13 C14 C15 C16 C17 C18 C19 C20 C63 C64 C? J4 J5 L1 L2 L3 L4 L5 L6 L7 L8 LED2 LED3 R16 R17 R21 R22 R23 R24 R25 R26 R27 R28 R29 R30 R31 R32 R33 R34 R51 U3
component class K7410tFFG900HR: U1
component class K7410tFFG900Aux: C1 C70 FB1 LED1 P1 R1 R2 R3 R4 R5 R6 R7 R8 R9 R10 R11 R12 R13 R14 R15 R56 R57 U2 U9
component class input: J1 J2 J3
differential pair GTP_REFCLK_CML: +GTP_REFCLK_CML_P -GTP_REFCLK_CML_N
differential pair FTDI11_LVDS25: +FTMS11_LVDS25_P -FTMS11_LVDS25_N
differential pair SFP2TX: +SFP2TX_P -SFP2TX_N
differential pair SFP2RX: +SFP2RX_P -SFP2RX_N
differential pair SFP1TX: +SFP1TX_P -SFP1TX_N
differential pair SFP1RX: +SFP1RX_P -SFP1RX_N
differential pair RESET12_LVDS25: +DATA12_LVDS25_P -DATA12_LVDS25_N
differential pair RESET11_LVDS25: +DATA11_LVDS25_P -DATA11_LVDS25_N
differential pair RESET10_LVDS25: +RESET10_LVDS25_P -RESET10_LVDS25_N
differential pair RESET9_LVDS25: +RESET9_LVDS25_P -RESET9_LVDS25_N
differential pair RESET8_LVDS25: +DATA8_LVDS25_P -DATA8_LVDS25_N
differential pair RESET7_LVDS25: +DATA7_LVDS25_P -DATA7_LVDS25_N
differential pair RESET6_LVDS25: +RESET6_LVDS25_P -RESET6_LVDS25_N
differential pair RESET5_LVDS25: +RESET5_LVDS25_P -RESET5_LVDS25_N
differential pair RESET4_LVDS25: +DATA4_LVDS25_P -DATA4_LVDS25_N
differential pair RESET3_LVDS25: +DATA3_LVDS25_P -DATA3_LVDS25_N
differential pair RESET2_LVDS25: +RESET2_LVDS25_P -RESET2_LVDS25_N
differential pair RESET1_LVDS25: +RESET1_LVDS25_P -RESET1_LVDS25_N
differential pair MGTrefclk_LVDS25: +MGTrefclk_LVDS25_P -MGTrefclk_LVDS25_N
differential pair MGTrefclk_CML: +MGTrefclk_CML_P -MGTrefclk_CML_N
differential pair GTP_REFCLK_LVDS33: +GTP_REFCLK_LVDS33_P -GTP_REFCLK_LVDS33_N
differential pair FTMS12_LVDS25: +FTDI12_LVDS25_P -FTDI12_LVDS25_N
differential pair FTMS11_LVDS25: +FTDI11_LVDS25_P -FTDI11_LVDS25_N
differential pair FTMS10_LVDS25: +FTMS10_LVDS25_P -FTMS10_LVDS25_N
differential pair FTMS9_LVDS25: +FTMS9_LVDS25_P -FTMS9_LVDS25_N
differential pair FTMS8_LVDS25: +FTDI8_LVDS25_P -FTDI8_LVDS25_N
differential pair FTMS7_LVDS25: +FTDI7_LVDS25_P -FTDI7_LVDS25_N
differential pair FTMS6_LVDS25: +FTMS6_LVDS25_P -FTMS6_LVDS25_N
differential pair FTMS5_LVDS25: +FTMS5_LVDS25_P -FTMS5_LVDS25_N
differential pair FTMS4_LVDS25: +FTDI4_LVDS25_P -FTDI4_LVDS25_N
differential pair FTMS3_LVDS25: +FTDI3_LVDS25_P -FTDI3_LVDS25_N
differential pair FTMS2_LVDS25: +FTMS2_LVDS25_P -FTMS2_LVDS25_N
differential pair FTMS1_LVDS25: +FTMS1_LVDS25_P -FTMS1_LVDS25_N
differential pair FTDO12_LVDS25: +FTCK12_LVDS25_P -FTCK12_LVDS25_N
differential pair FTDO11_LVDS25: +FTCK11_LVDS25_P -FTCK11_LVDS25_N
differential pair FTDO10_LVDS25: +FTDO10_LVDS25_P -FTDO10_LVDS25_N
differential pair FTDO9_LVDS25: +FTDO9_LVDS25_P -FTDO9_LVDS25_N
differential pair FTDO8_LVDS25: +FTCK8_LVDS25_P -FTCK8_LVDS25_N
differential pair FTDO7_LVDS25: +FTCK7_LVDS25_P -FTCK7_LVDS25_N
differential pair FTDO6_LVDS25: +FTDO6_LVDS25_P -FTDO6_LVDS25_N
differential pair FTDO5_LVDS25: +FTDO5_LVDS25_P -FTDO5_LVDS25_N
differential pair FTDO4_LVDS25: +FTCK4_LVDS25_P -FTCK4_LVDS25_N
differential pair FTDO3_LVDS25: +FTCK3_LVDS25_P -FTCK3_LVDS25_N
differential pair FTDO2_LVDS25: +FTDO2_LVDS25_P -FTDO2_LVDS25_N
differential pair FTDO1_LVDS25: +FTDO1_LVDS25_P -FTDO1_LVDS25_N
differential pair FTDI12_LVDS25: +FTMS12_LVDS25_P -FTMS12_LVDS25_N
differential pair FTDI10_LVDS25: +FTDI10_LVDS25_P -FTDI10_LVDS25_N
differential pair FTDI9_LVDS25: +FTDI9_LVDS25_P -FTDI9_LVDS25_N
differential pair FTDI8_LVDS25: +FTMS8_LVDS25_P -FTMS8_LVDS25_N
differential pair FTDI7_LVDS25: +FTMS7_LVDS25_P -FTMS7_LVDS25_N
differential pair FTDI6_LVDS25: +FTDI6_LVDS25_P -FTDI6_LVDS25_N
differential pair FTDI5_LVDS25: +FTDI5_LVDS25_P -FTDI5_LVDS25_N
differential pair FTDI4_LVDS25: +FTMS4_LVDS25_P -FTMS4_LVDS25_N
differential pair FTDI3_LVDS25: +FTMS3_LVDS25_P -FTMS3_LVDS25_N
differential pair FTDI2_LVDS25: +FTDI2_LVDS25_P -FTDI2_LVDS25_N
differential pair FTDI1_LVDS25: +FTDI1_LVDS25_P -FTDI1_LVDS25_N
differential pair FTCK12_LVDS25: +FTDO12_LVDS25_P -FTDO12_LVDS25_N
differential pair FTCK11_LVDS25: +FTDO11_LVDS25_P -FTDO11_LVDS25_N
differential pair FTCK10_LVDS25: +FTCK10_LVDS25_P -FTCK10_LVDS25_N
differential pair FTCK9_LVDS25: +FTCK9_LVDS25_P -FTCK9_LVDS25_N
differential pair FTCK8_LVDS25: +FTDO8_LVDS25_P -FTDO8_LVDS25_N
differential pair FTCK7_LVDS25: +FTDO7_LVDS25_P -FTDO7_LVDS25_N
differential pair FTCK6_LVDS25: +FTCK6_LVDS25_P -FTCK6_LVDS25_N
differential pair FTCK5_LVDS25: +FTCK5_LVDS25_P -FTCK5_LVDS25_N
differential pair FTCK4_LVDS25: +FTDO4_LVDS25_P -FTDO4_LVDS25_N
differential pair FTCK3_LVDS25: +FTDO3_LVDS25_P -FTDO3_LVDS25_N
differential pair FTCK2_LVDS25: +FTCK2_LVDS25_P -FTCK2_LVDS25_N
differential pair FTCK1_LVDS25: +FTCK1_LVDS25_P -FTCK1_LVDS25_N
differential pair FB12_LVDS25: +CLK12_LVDS25_P -CLK12_LVDS25_N
differential pair FB11_LVDS25: +CLK11_LVDS25_P -CLK11_LVDS25_N
differential pair FB10_LVDS25: +FB10_LVDS25_P -FB10_LVDS25_N
differential pair FB9_LVDS25: +FB9_LVDS25_P -FB9_LVDS25_N
differential pair FB8_LVDS25: +CLK8_LVDS25_P -CLK8_LVDS25_N
differential pair FB7_LVDS25: +CLK7_LVDS25_P -CLK7_LVDS25_N
differential pair FB6_LVDS25: +FB6_LVDS25_P -FB6_LVDS25_N
differential pair FB5_LVDS25: +FB5_LVDS25_P -FB5_LVDS25_N
differential pair FB4_LVDS25: +CLK4_LVDS25_P -CLK4_LVDS25_N
differential pair FB3_LVDS25: +CLK3_LVDS25_P -CLK3_LVDS25_N
differential pair FB2_LVDS25: +FB2_LVDS25_P -FB2_LVDS25_N
differential pair FB1_LVDS25: +FB1_LVDS25_P -FB1_LVDS25_N
differential pair DATA12_LVDS25: +RESET12_LVDS25_P -RESET12_LVDS25_N
differential pair DATA11_LVDS25: +RESET11_LVDS25_P -RESET11_LVDS25_N
differential pair DATA10_LVDS25: +DATA10_LVDS25_P -DATA10_LVDS25_N
differential pair DATA9_LVDS25: +DATA9_LVDS25_P -DATA9_LVDS25_N
differential pair DATA8_LVDS25: +RESET8_LVDS25_P -RESET8_LVDS25_N
differential pair DATA7_LVDS25: +RESET7_LVDS25_P -RESET7_LVDS25_N
differential pair DATA6_LVDS25: +DATA6_LVDS25_P -DATA6_LVDS25_N
differential pair DATA5_LVDS25: +DATA5_LVDS25_P -DATA5_LVDS25_N
differential pair DATA4_LVDS25: +RESET4_LVDS25_P -RESET4_LVDS25_N
differential pair DATA3_LVDS25: +RESET3_LVDS25_P -RESET3_LVDS25_N
differential pair DATA2_LVDS25: +DATA2_LVDS25_P -DATA2_LVDS25_N
differential pair DATA1_LVDS25: +DATA1_LVDS25_P -DATA1_LVDS25_N
differential pair CLK12_LVDS25: +FB12_LVDS25_P -FB12_LVDS25_N
differential pair CLK11_LVDS25: +FB11_LVDS25_P -FB11_LVDS25_N
differential pair CLK10_LVDS25: +CLK10_LVDS25_P -CLK10_LVDS25_N
differential pair CLK9_LVDS25: +CLK9_LVDS25_P -CLK9_LVDS25_N
differential pair CLK8_LVDS25: +FB8_LVDS25_P -FB8_LVDS25_N
differential pair CLK7_LVDS25: +FB7_LVDS25_P -FB7_LVDS25_N
differential pair CLK6_LVDS25: +CLK6_LVDS25_P -CLK6_LVDS25_N
differential pair CLK5_LVDS25: +CLK5_LVDS25_P -CLK5_LVDS25_N
differential pair CLK4_LVDS25: +FB4_LVDS25_P -FB4_LVDS25_N
differential pair CLK3_LVDS25: +FB3_LVDS25_P -FB3_LVDS25_N
differential pair CLK2_LVDS25: +CLK2_LVDS25_P -CLK2_LVDS25_N
differential pair CLK1_LVDS25: +CLK1_LVDS25_P -CLK1_LVDS25_N

## Components (designator, comment, footprint, x,y, rotation, side; value= is the part's Value field where it differs from the comment)
B1 "SMA" SMA_2 1012.43,6919 r0 top
B2 "SMA" SMA_2 1362.88,6919 r0 top locked
B3 "SMA" SMA_2 1713.33,6919 r0 top locked
B4 "SMA" SMA_2 2063.79,6919 r0 top locked
B5 "SMA" SMA_2 2414.24,6919 r0 top locked
B6 "SMA" SMA_2 2764.7,6919 r0 top locked
B7 "SMA" SMA_2 3115.15,6919 r0 top locked
B8 "SMA" SMA_2 3465.61,6919 r0 top locked
B9 "SMA" SMA_2 3816.06,6919 r0 top locked
B10 "SMA" SMA_2 4166.52,6919 r0 top locked
B11 "SMA" SMA_2 4516.97,6919 r0 top locked
B12 "SMA" SMA_2 4867.42,6919 r0 top locked
B13 "SMA" SMA_2 8125.57,6916.43 r0 top
B14 "SMA" SMA_2 7763.57,6916.43 r0 top
C1 "jc1.0" 0402 5332,3631.18 r180 top value=0.1uF
C2 "jc1.0" 0402 6891,5236 r270 bottom value=1uF
C3 "jc1.0" 0402 6943,5236 r270 bottom value=0.1uF
C4 "jc1.0" 0402 6996,5236 r270 bottom value=0.001uF
C5 "jc1.0" 0402 6917.41,5051 r270 top value=100pF
C6 "jc1.0" 0402 6498,4470 r270 top value=0.22uF
C7 "jc1.0" 0402 6878.41,5051 r270 top value=100pF
C8 "jc1.0" 0805 6538,5734 r270 bottom value=0.1uF
C9 "jc1.0" 0805 7162,6007 r0 top value=10uF
C10 "jc1.0" 0805 6722,5734 r270 bottom value=0.1uF
C11 "jc1.0" 0805 7162,5911 r0 top value=0.1uF
C12 "jc1.0" 0805 6627,5734 r270 bottom value=10uF
C13 "jc1.0" 0402 7118,4091 r270 top value=4.7uF
C14 "jc1.0" 0402 6445,4123 r270 bottom value=4.7uF
C15 "jc1.0" 0805 5587,5734 r270 bottom value=0.1uF
C16 "jc1.0" 0805 5176,5888 r180 top value=10uF
C17 "jc1.0" 0402 7118,4241.11 r270 top value=4.7uF
C18 "jc1.0" 0805 5761,5734 r270 bottom value=0.1uF
C19 "jc1.0" 0805 5176,5984 r180 top value=0.1uF
C20 "jc1.0" 0805 5673,5734 r270 bottom value=10uF
C21 "jc1.0" 2220 6794,4507 r270 top value=330uF
C22 "jc1.0" 2220 7027,4506 r270 top value=330uF
C23 "jc1.0" 2220 7260,4506 r270 top value=330uF
C24 "jc1.0" 2220 7260,4506 r270 bottom value=330uF
C25 "jc1.0" 2220 7027,4506 r270 bottom value=330uF
C26 "jc1.0" 2220 6794,4507 r270 bottom value=330uF
C27 "jc1.0" 1210 5992,4494 r270 bottom value=47uF
C28 "jc1.0" 1210 5826,4084 r90 bottom value=47uF
C29 "jc1.0" 1210 6148,3627 r180 bottom value=47uF
C30 "jc1.0" 1210 6073,3799 r90 bottom value=47uF
C31 "jc1.0" 1210 5826,4003 r270 bottom value=47uF
C32 "jc1.0" 1210 6087.46,4091.54 r135 bottom value=47uF
C33 "jc1.0" 1210 7269,3810 r90 bottom value=47uF
C34 "jc1.0" 1210 6669,3078 r135 bottom value=47uF
C35 "jc1.0" 1210 7105,3832 r180 bottom value=47uF
C36 "jc1.0" 1210 6340,3120 r0 bottom value=47uF
C37 "jc1.0" 1210 6234,3049 r180 bottom value=47uF
C38 "jc1.0" 1210 5826,3649 r270 bottom value=47uF
C39 "jc1.0" 1210 7100,3426 r90 bottom value=47uF
C40 "jc1.0" 1210 7101,3346 r270 bottom value=47uF
C41 "jc1.0" 0603 6314,5130 r270 bottom value=0.1uF
C44 "jc1.0" 2220 11489,6459 r180 top value=180uF@30V
C45 "jc1.0" 2220 11489,6234 r180 top value=10uF@30V
C46 "jc1.0" 2220 11490,6006 r180 top value=10uF@30V
C47 "jc1.0" 2220 10878,6228 r0 top value=10uF@30V
C48 "jc1.0" 2220 10877,6002 r0 top value=10uF@30V
C49 "jc1.0" 0805 7464,4924 r90 top value=47uF@6.3V
C50 "jc1.0" 0805 10291,3367 r90 top value=47uF@6.3V
C51 "jc1.0" 0402 7261,5343 r90 top value=0.1uF@6.3V
C52 "jc1.0" 0402 10025,3807 r90 top value=0.1uF@6.3V
C55 "jc1.0" 0805 7663,4924 r90 top value=47uF@6.3V
C56 "jc1.0" 0805 10441,3367 r90 top value=47uF@6.3V
C57 "jc1.0" 0402 7639,5526 r270 top value=0.1uF@6.3V
C58 "jc1.0" 0402 10409,4001 r270 top value=0.1uF@6.3V
C59 "jc1.0" 0805 7813,4924 r90 top value=47uF@6.3V
C60 "jc1.0" 0805 10591,3367 r90 top value=47uF@6.3V
C61 "jc1.0" 0402 7992.41,5392 r180 top value=0.1uF@6.3V
C62 "jc1.0" 0402 10790,3860 r180 top value=0.1uF@6.3V
C63 "jc1.0" 0402 8804,3986 r180 top value=0.1uF
C64 "jc1.0" 0402 8804,4027 r180 top value=0.1uF
C70 "jc1.0" 0402 8715,4177 r90 top value=100nF
FB1 "Ferrite Bead" 0603 6253,3748 r0 bottom
J1 "44520-0002" 44520-0002 2805,229.8 r0 top locked
J2 "44520-0002" 44520-0002 6430,229.8 r0 top locked
J3 "44520-0002" 44520-0002 10055,229.8 r0 top locked
J4 "2227023-1" TE_2227023-1 6639.49,5687.17 r270 top locked
J5 "2227023-1" TE_2227023-1 5685.51,5686.46 r270 top locked
L1 "Inductor" 0603 6447,4480 r90 top value=FB-220
L2 "Inductor" 1210 7114,5625 r0 top value=FB-220
L3 "Inductor" 1210 7249,5782 r180 top value=FB-220
L4 "Inductor" 1210 7322,4065.41 r180 top value=FB-220
L5 "Inductor" 1210 6145,4339 r0 bottom value=FB-220
L6 "Inductor" 1210 5222,5609 r180 top value=FB-220
L7 "Inductor" 1210 7317,4215.52 r180 top value=FB-220
L8 "Inductor" 1210 5087,5762 r0 top value=FB-220
L9 "Inductor" "AXIAL0.3 - 35" 11277,6459 r180 top value=10uH
LED1 "LED1" LED1 7415,6973 r180 top
LED2 "LED1" LED1 6182.5,6973.5 r180 top
LED3 "LED1" LED1 5211.5,6972.5 r180 top
LED4 "LED2" LED2 9997,6870 r90 top
LED5 "LED2" LED2 10280.5,6870 r90 top
LED6 "LED2" LED2 10564,6870 r90 top
LED7 "LED1" LED1 11036.5,6973.5 r180 top
P1 "FPGAJTAG" SIP6 9657,7021 r180 top
P2 "SIP4" HDR1X4 8820,7024 r180 top
P3 "PowerPlug1" POWERPLUG1 11833.15,6873 r0 top
R1 "jr1.0" 0402 6642,4418 r90 top value=4.7kohm
R2 "jr1.0" 0402 7144,3928 r0 top value=4.7kohm
R3 "jr1.0" 0402 6561.14,4418 r90 top value=332
R4 "jr1.0" 0402 6209,4392 r90 top value=1kohm
R5 "jr1.0" 0402 6169,4392 r90 top value=1kohm
R6 "jr1.0" 0402 6113,4489.59 r90 top value=1kohm
R7 "jr1.0" 0402 5158,3631 r0 top value=DNP
R8 "jr1.0" 0402 5101,3743 r180 top value=4.7kohm
R9 "jr1.0" 0402 5143,4021 r270 top value=4.7kohm
R10 "jr1.0" 0402 5657,3916.41 r270 top value=DNP
R11 "jr1.0" 0402 5657,3775 r90 top value=4.7kohm
R12 "jr1.0" 0402 5067.41,4047 r180 top value=15
R13 "jr1.0" 0402 5683,3994 r180 top value=15
R14 "jr1.0" 0402 5107,3694 r180 top value=15
R15 "jr1.0" 0402 5682,3694 r180 top value=15
R16 "jr1.0" 0402 7131,5228 r270 top value=4.7K
R17 "jr1.0" 0402 6475.41,4397 r180 top value=100ohm
R21 "jr1.0" 0402 6083,6796 r90 bottom value=1kohm
R22 "jr1.0" 0402 6529,5961 r270 bottom value=4.7kohm
R23 "jr1.0" 0402 6742,5961 r270 bottom value=4.7kohm
R24 "jr1.0" 0402 6692.2,5961 r270 bottom value=4.7kohm
R25 "jr1.0" 0402 6651.4,5961 r270 bottom value=4.7kohm
R26 "jr1.0" 0402 6610.6,5961 r270 bottom value=4.7kohm
R27 "jr1.0" 0402 6569.8,5961 r270 bottom value=4.7kohm
R28 "jr1.0" 0402 5112,6781 r90 bottom value=1kohm
R29 "jr1.0" 0402 5578,5968 r270 bottom value=4.7kohm
R30 "jr1.0" 0402 5788,5968 r270 bottom value=4.7kohm
R31 "jr1.0" 0402 5744,5968 r270 bottom value=4.7kohm
R32 "jr1.0" 0402 5702.5,5968 r270 bottom value=4.7kohm
R33 "jr1.0" 0402 5661,5968 r270 bottom value=4.7kohm
R34 "jr1.0" 0402 5619.5,5968 r270 bottom value=4.7kohm
R36 "jr1.0" 0805 10188,6654 r180 top value=300
R37 "jr1.0" 0805 10097,6750 r180 top value=300
R38 "jr1.0" 0805 10472,6654 r180 top value=300
R39 "jr1.0" 0805 10380,6751 r180 top value=300
R40 "jr1.0" 0805 10756,6654 r180 top value=300
R41 "jr1.0" 0805 10666,6750 r180 top value=300
R42 "jr1.0" 0402 7581,5251 r270 bottom value=114kohm
R43 "jr1.0" 0402 10362,3716 r270 bottom value=114kohm
R44 "jr1.0" 0805 7364,5628 r270 top value=45.3kohm
R45 "jr1.0" 0805 10141,4102 r270 top value=6.65kohm
R47 "jr1.0" 0805 7706,5603 r270 top value=90.9kohm
R48 "jr1.0" 0805 10475,4078 r270 top value=30.1kohm
R49 "jr1.0" 0805 7800,5603 r270 top value=60.4kohm
R50 "jr1.0" 0805 10572,4078 r270 top value=19.1kohm
R54 "jr1.0" 0805 11192,6871 r90 top value=1K
R56 "jr1.0" 0402 8573.41,4104 r180 top value=4.7kohm
R57 "jr1.0" 0402 8572,4289 r180 top value=4.7kohm
U1 "XC7K410T-2FFG900I" FFG900 6445.06,3709.61 r270 top locked
U2 "S25FL256SAGMFI003" SO3016 5397.18,3869 r0 top
U3 "EG-2121CA" DFN3 7047,5309.54 r180 top
U4 "OSCILLATORMNT" S11 6415,5221 r180 top
U5 "LTM4644IY#PBF" BGA77C127P7X11_900X1500X521 7613,5268 r90 top locked
U6 "LTM4644IY#PBF" BGA77C127P7X11_900X1500X521 10391,3732 r90 top locked
U7 "KZT0920309" KZT0920309 9536,5003 r270 top
U9 "GXHT30" GXHT30 8568,4196 r0 top

## Footprints (in the part's own frame and the unit in brackets; to place one, negate y for a bottom-side part, rotate by r counter-clockwise, add the part's x,y. Pads: shape width x height; smd on the part's side, far side on the other; paste and mask are expansions set on the pad)
0402 [mm] "Chip Capacitor; Body 1.0 x 0.5 mm (LxW typ)"
  rect 0.9x0.7 smd: 1(-0.65,0) 2(0.65,0)
0603 [mm] "Chip Capacitor; Body 1.6 x 0.8 mm (LxW typ)"
  rect 1.1x1 smd: 1(-0.85,0) 2(0.85,0)
0805 [mil]
  rect 60x50 smd: 1(0,0) 2(90,0)
  silkscreen extent -50,-40 135,40
1210 [mil]
  rect 60x100 smd: 1(0,0) 2(135,0)
  silkscreen extent -50,-70 185,70
2220 [mm] "Chip Capacitor; Body 5.7 x 5.0 mm (LxW typ)"
  rect 1.85x5.2 smd: 1(-2.525,0) 2(2.525,0)
  silkscreen extent -1.3,-2.5 1.3,2.5
44520-0002 [mm] "Connector; PCB Jack, Thru-Hole; 12-Port, 8 Positions, 8 Loaded; Shielded without Lightpipes; Right Angle"
  rect 1.5x1.5 hole 0.9: A1(-30.48,26.294) B1(-16.51,26.294) C1(-2.54,26.294) D1(11.43,26.294) E1(25.4,26.294) F1(39.37,26.294)
  round 1.5 hole 0.9: A2(-31.75,23.754) A3(-33.02,26.294) A4(-34.29,23.754) A5(-35.56,26.294) A6(-36.83,23.754) A7(-38.1,26.294) A8(-39.37,23.754) B2(-17.78,23.754) B3(-19.05,26.294) B4(-20.32,23.754) B5(-21.59,26.294) B6(-22.86,23.754) B7(-24.13,26.294) B8(-25.4,23.754) C2(-3.81,23.754) C3(-5.08,26.294) C4(-6.35,23.754) C5(-7.62,26.294) C6(-8.89,23.754) C7(-10.16,26.294) C8(-11.43,23.754) D2(10.16,23.754) D3(8.89,26.294) D4(7.62,23.754) D5(6.35,26.294) D6(5.08,23.754) D7(3.81,26.294) D8(2.54,23.754) E2(24.13,23.754) E3(22.86,26.294) E4(21.59,23.754) E5(20.32,26.294) E6(19.05,23.754) E7(17.78,26.294) E8(16.51,23.754) F2(38.1,23.754) F3(36.83,26.294) F4(35.56,23.754) F5(34.29,26.294) F6(33.02,23.754) F7(31.75,26.294) F8(30.48,23.754)
  rect 1.6x1.6 hole 0.9: G1(-39.37,17.15) H1(-25.4,17.15) I1(-11.43,17.15) J1(2.54,17.15) K1(16.51,17.15) L1(30.48,17.15)
  round 1.6 hole 0.9: G2(-38.1,19.69) G3(-36.83,17.15) G4(-35.56,19.69) G5(-34.29,17.15) G6(-33.02,19.69) G7(-31.75,17.15) G8(-30.48,19.69) H2(-24.13,19.69) H3(-22.86,17.15) H4(-21.59,19.69) H5(-20.32,17.15) H6(-19.05,19.69) H7(-17.78,17.15) H8(-16.51,19.69) I2(-10.16,19.69) I3(-8.89,17.15) I4(-7.62,19.69) I5(-6.35,17.15) I6(-5.08,19.69) I7(-3.81,17.15) I8(-2.54,19.69) J2(3.81,19.69) J3(5.08,17.15) J4(6.35,19.69) J5(7.62,17.15) J6(8.89,19.69) J7(10.16,17.15) J8(11.43,19.69) K2(17.78,19.69) K3(19.05,17.15) K4(20.32,19.69) K5(21.59,17.15) K6(22.86,19.69) K7(24.13,17.15) K8(25.4,19.69) L2(31.75,19.69) L3(33.02,17.15) L4(34.29,19.69) L5(35.56,17.15) L6(36.83,19.69) L7(38.1,17.15) L8(39.37,19.69)
  round 2.65 hole 1.6: MH1(-43.434,26.294) MH2(-27.305,27.564) MH3(-13.335,27.564) MH4(0.635,27.564) MH5(14.605,27.564) MH6(28.575,27.564) MH7(43.434,22.23) MH8(-42.799,19.944) MH9(-27.305,20.96) MH10(-13.335,20.96) MH11(0.635,20.96) MH12(14.605,20.96) MH13(28.575,20.96) MH14(42.799,16.642) MH15(-43.434,6.228) MH16(43.434,6.228)
  round 2.95 hole 3.25 unplated: MH17(-40.64,10.8) MH18(40.64,10.8)
  silkscreen extent -43.56,0 43.56,27.69
"AXIAL0.3 - 35" [mil]
  round 60 hole 35: 1(0,0) 2(300,0)
  silkscreen extent 41,-30 259,30
BGA77C127P7X11_900X1500X521 [mm] "BGA, 77-Leads, Body 9.00x15.00mmx5.21mm, Pitch 1.27mm"
  round 0.63 smd: A1(-3.81,6.35) A2(-2.54,6.35) A3(-1.27,6.35) A4(0,6.35) A5(1.27,6.35) A6(2.54,6.35) A7(3.81,6.35) B1(-3.81,5.08) B2(-2.54,5.08) B3(-1.27,5.08) B4(0,5.08) B5(1.27,5.08) B6(2.54,5.08) B7(3.81,5.08) C1(-3.81,3.81) C2(-2.54,3.81) C3(-1.27,3.81) C4(0,3.81) C5(1.27,3.81) C6(2.54,3.81) C7(3.81,3.81) D1(-3.81,2.54) D2(-2.54,2.54) D3(-1.27,2.54) D4(0,2.54) D5(1.27,2.54) D6(2.54,2.54) D7(3.81,2.54) E1(-3.81,1.27) E2(-2.54,1.27) E3(-1.27,1.27) E4(0,1.27) E5(1.27,1.27) E6(2.54,1.27) E7(3.81,1.27) F1(-3.81,0) F2(-2.54,0) F3(-1.27,0) F4(0,0) F5(1.27,0) F6(2.54,0) F7(3.81,0) G1(-3.81,-1.27) G2(-2.54,-1.27) G3(-1.27,-1.27) G4(0,-1.27) G5(1.27,-1.27) G6(2.54,-1.27) G7(3.81,-1.27) H1(-3.81,-2.54) H2(-2.54,-2.54) H3(-1.27,-2.54) H4(0,-2.54) H5(1.27,-2.54) H6(2.54,-2.54) H7(3.81,-2.54) J1(-3.81,-3.81) J2(-2.54,-3.81) J3(-1.27,-3.81) J4(0,-3.81) J5(1.27,-3.81) J6(2.54,-3.81) J7(3.81,-3.81) K1(-3.81,-5.08) K2(-2.54,-5.08) K3(-1.27,-5.08) K4(0,-5.08) K5(1.27,-5.08) K6(2.54,-5.08) K7(3.81,-5.08) L1(-3.81,-6.35) L2(-2.54,-6.35) L3(-1.27,-6.35) L4(0,-6.35) L5(1.27,-6.35) L6(2.54,-6.35) L7(3.81,-6.35)
  silkscreen extent -5.27,-7.5 4.5,7.5, body extent -4.5,-7.5 4.5,7.5, height 5.21
DFN3 [mm]
  rect 1.6x1.5 smd: 1(0,0) 2(2.54,0) 3(5.08,0) 4(5.08,3.9) 5(2.54,3.9) 6(0,3.9)
  silkscreen extent -2.44,-1.14 6.22,4.95
FFG900 [mm] "BGA, 900-Balls, Body 31x31mm, Pitch 1mm"
  round 0.5 smd: A1(-14.5,14.5) A2(-13.5,14.5) A3(-12.5,14.5) A4(-11.5,14.5) A5(-10.5,14.5) A6(-9.5,14.5) A7(-8.5,14.5) A8(-7.5,14.5) A9(-6.5,14.5) A10(-5.5,14.5) A11(-4.5,14.5) A12(-3.5,14.5) A13(-2.5,14.5) A14(-1.5,14.5) A15(-0.5,14.5) A16(0.5,14.5) A17(1.5,14.5) A18(2.5,14.5) A19(3.5,14.5) A20(4.5,14.5) A21(5.5,14.5) A22(6.5,14.5) A23(7.5,14.5) A24(8.5,14.5) A25(9.5,14.5) A26(10.5,14.5) A27(11.5,14.5) A28(12.5,14.5) A29(13.5,14.5) A30(14.5,14.5) AA1(-14.5,-5.5) AA2(-13.5,-5.5) AA3(-12.5,-5.5) AA4(-11.5,-5.5) AA5(-10.5,-5.5) AA6(-9.5,-5.5) AA7(-8.5,-5.5) AA8(-7.5,-5.5) AA9(-6.5,-5.5) AA10(-5.5,-5.5) AA11(-4.5,-5.5) AA12(-3.5,-5.5) AA13(-2.5,-5.5) AA14(-1.5,-5.5) AA15(-0.5,-5.5) AA16(0.5,-5.5) AA17(1.5,-5.5) AA18(2.5,-5.5) AA19(3.5,-5.5) AA20(4.5,-5.5) AA21(5.5,-5.5) AA22(6.5,-5.5) AA23(7.5,-5.5) AA24(8.5,-5.5) AA25(9.5,-5.5) AA26(10.5,-5.5) AA27(11.5,-5.5) AA28(12.5,-5.5) AA29(13.5,-5.5) AA30(14.5,-5.5) AB1(-14.5,-6.5) AB2(-13.5,-6.5) AB3(-12.5,-6.5) AB4(-11.5,-6.5) AB5(-10.5,-6.5) AB6(-9.5,-6.5) AB7(-8.5,-6.5) AB8(-7.5,-6.5) AB9(-6.5,-6.5) AB10(-5.5,-6.5) AB11(-4.5,-6.5) AB12(-3.5,-6.5) AB13(-2.5,-6.5) AB14(-1.5,-6.5) AB15(-0.5,-6.5) AB16(0.5,-6.5) AB17(1.5,-6.5) AB18(2.5,-6.5) AB19(3.5,-6.5) AB20(4.5,-6.5) AB21(5.5,-6.5) AB22(6.5,-6.5) AB23(7.5,-6.5) AB24(8.5,-6.5) AB25(9.5,-6.5) AB26(10.5,-6.5) AB27(11.5,-6.5) AB28(12.5,-6.5) AB29(13.5,-6.5) AB30(14.5,-6.5) AC1(-14.5,-7.5) AC2(-13.5,-7.5) AC3(-12.5,-7.5) AC4(-11.5,-7.5) AC5(-10.5,-7.5) AC6(-9.5,-7.5) AC7(-8.5,-7.5) AC8(-7.5,-7.5) AC9(-6.5,-7.5) AC10(-5.5,-7.5) AC11(-4.5,-7.5) AC12(-3.5,-7.5) AC13(-2.5,-7.5) AC14(-1.5,-7.5) AC15(-0.5,-7.5) AC16(0.5,-7.5) AC17(1.5,-7.5) AC18(2.5,-7.5) AC19(3.5,-7.5) AC20(4.5,-7.5) AC21(5.5,-7.5) AC22(6.5,-7.5) AC23(7.5,-7.5) AC24(8.5,-7.5) AC25(9.5,-7.5) AC26(10.5,-7.5) AC27(11.5,-7.5) AC28(12.5,-7.5) AC29(13.5,-7.5) AC30(14.5,-7.5) AD1(-14.5,-8.5) AD2(-13.5,-8.5) AD3(-12.5,-8.5) AD4(-11.5,-8.5) AD5(-10.5,-8.5) AD6(-9.5,-8.5) AD7(-8.5,-8.5) AD8(-7.5,-8.5) AD9(-6.5,-8.5) AD10(-5.5,-8.5) AD11(-4.5,-8.5) AD12(-3.5,-8.5) AD13(-2.5,-8.5) AD14(-1.5,-8.5) AD15(-0.5,-8.5) AD16(0.5,-8.5) AD17(1.5,-8.5) AD18(2.5,-8.5) AD19(3.5,-8.5) AD20(4.5,-8.5) AD21(5.5,-8.5) AD22(6.5,-8.5) AD23(7.5,-8.5) AD24(8.5,-8.5) AD25(9.5,-8.5) AD26(10.5,-8.5) AD27(11.5,-8.5) AD28(12.5,-8.5) AD29(13.5,-8.5) AD30(14.5,-8.5) AE1(-14.5,-9.5) AE2(-13.5,-9.5) AE3(-12.5,-9.5) AE4(-11.5,-9.5) AE5(-10.5,-9.5) AE6(-9.5,-9.5) AE7(-8.5,-9.5) AE8(-7.5,-9.5) AE9(-6.5,-9.5) AE10(-5.5,-9.5) AE11(-4.5,-9.5) AE12(-3.5,-9.5) AE13(-2.5,-9.5) AE14(-1.5,-9.5) AE15(-0.5,-9.5) AE16(0.5,-9.5) AE17(1.5,-9.5) AE18(2.5,-9.5) AE19(3.5,-9.5) AE20(4.5,-9.5) AE21(5.5,-9.5) AE22(6.5,-9.5) AE23(7.5,-9.5) AE24(8.5,-9.5) AE25(9.5,-9.5) AE26(10.5,-9.5) AE27(11.5,-9.5) AE28(12.5,-9.5) AE29(13.5,-9.5) AE30(14.5,-9.5) AF1(-14.5,-10.5) AF2(-13.5,-10.5) AF3(-12.5,-10.5) AF4(-11.5,-10.5) AF5(-10.5,-10.5) AF6(-9.5,-10.5) AF7(-8.5,-10.5) AF8(-7.5,-10.5) AF9(-6.5,-10.5) AF10(-5.5,-10.5) AF11(-4.5,-10.5) AF12(-3.5,-10.5) AF13(-2.5,-10.5) AF14(-1.5,-10.5) AF15(-0.5,-10.5) AF16(0.5,-10.5) AF17(1.5,-10.5) AF18(2.5,-10.5) AF19(3.5,-10.5) AF20(4.5,-10.5) AF21(5.5,-10.5) AF22(6.5,-10.5) AF23(7.5,-10.5) AF24(8.5,-10.5) AF25(9.5,-10.5) AF26(10.5,-10.5) AF27(11.5,-10.5) AF28(12.5,-10.5) AF29(13.5,-10.5) AF30(14.5,-10.5) AG1(-14.5,-11.5) AG2(-13.5,-11.5) AG3(-12.5,-11.5) AG4(-11.5,-11.5) AG5(-10.5,-11.5) AG6(-9.5,-11.5) AG7(-8.5,-11.5) AG8(-7.5,-11.5) AG9(-6.5,-11.5) AG10(-5.5,-11.5) AG11(-4.5,-11.5) AG12(-3.5,-11.5) AG13(-2.5,-11.5) AG14(-1.5,-11.5) AG15(-0.5,-11.5) AG16(0.5,-11.5) AG17(1.5,-11.5) AG18(2.5,-11.5) AG19(3.5,-11.5) AG20(4.5,-11.5) AG21(5.5,-11.5) AG22(6.5,-11.5) AG23(7.5,-11.5) AG24(8.5,-11.5) AG25(9.5,-11.5) AG26(10.5,-11.5) AG27(11.5,-11.5) AG28(12.5,-11.5) AG29(13.5,-11.5) AG30(14.5,-11.5) AH1(-14.5,-12.5) AH2(-13.5,-12.5) AH3(-12.5,-12.5) AH4(-11.5,-12.5) AH5(-10.5,-12.5) AH6(-9.5,-12.5) AH7(-8.5,-12.5) AH8(-7.5,-12.5) AH9(-6.5,-12.5) AH10(-5.5,-12.5) AH11(-4.5,-12.5) AH12(-3.5,-12.5) AH13(-2.5,-12.5) AH14(-1.5,-12.5) AH15(-0.5,-12.5) AH16(0.5,-12.5) AH17(1.5,-12.5) AH18(2.5,-12.5) AH19(3.5,-12.5) AH20(4.5,-12.5) AH21(5.5,-12.5) AH22(6.5,-12.5) AH23(7.5,-12.5) AH24(8.5,-12.5) AH25(9.5,-12.5) AH26(10.5,-12.5) AH27(11.5,-12.5) AH28(12.5,-12.5) AH29(13.5,-12.5) AH30(14.5,-12.5) AJ1(-14.5,-13.5) AJ2(-13.5,-13.5) AJ3(-12.5,-13.5) AJ4(-11.5,-13.5) AJ5(-10.5,-13.5) AJ6(-9.5,-13.5) AJ7(-8.5,-13.5) AJ8(-7.5,-13.5) AJ9(-6.5,-13.5) AJ10(-5.5,-13.5) AJ11(-4.5,-13.5) AJ12(-3.5,-13.5) AJ13(-2.5,-13.5) AJ14(-1.5,-13.5) AJ15(-0.5,-13.5) AJ16(0.5,-13.5) AJ17(1.5,-13.5) AJ18(2.5,-13.5) AJ19(3.5,-13.5) AJ20(4.5,-13.5) AJ21(5.5,-13.5) AJ22(6.5,-13.5) AJ23(7.5,-13.5) AJ24(8.5,-13.5) AJ25(9.5,-13.5) AJ26(10.5,-13.5) AJ27(11.5,-13.5) AJ28(12.5,-13.5) AJ29(13.5,-13.5) AJ30(14.5,-13.5) AK1(-14.5,-14.5) AK2(-13.5,-14.5) AK3(-12.5,-14.5) AK4(-11.5,-14.5) AK5(-10.5,-14.5) AK6(-9.5,-14.5) AK7(-8.5,-14.5) AK8(-7.5,-14.5) AK9(-6.5,-14.5) AK10(-5.5,-14.5) AK11(-4.5,-14.5) AK12(-3.5,-14.5) AK13(-2.5,-14.5) AK14(-1.5,-14.5) AK15(-0.5,-14.5) AK16(0.5,-14.5) AK17(1.5,-14.5) AK18(2.5,-14.5) AK19(3.5,-14.5) AK20(4.5,-14.5) AK21(5.5,-14.5) AK22(6.5,-14.5) AK23(7.5,-14.5) AK24(8.5,-14.5) AK25(9.5,-14.5) AK26(10.5,-14.5) AK27(11.5,-14.5) AK28(12.5,-14.5) AK29(13.5,-14.5) AK30(14.5,-14.5) B1(-14.5,13.5) B2(-13.5,13.5) B3(-12.5,13.5) B4(-11.5,13.5) B5(-10.5,13.5) B6(-9.5,13.5) B7(-8.5,13.5) B8(-7.5,13.5) B9(-6.5,13.5) B10(-5.5,13.5) B11(-4.5,13.5) B12(-3.5,13.5) B13(-2.5,13.5) B14(-1.5,13.5) B15(-0.5,13.5) B16(0.5,13.5) B17(1.5,13.5) B18(2.5,13.5) B19(3.5,13.5) B20(4.5,13.5) B21(5.5,13.5) B22(6.5,13.5) B23(7.5,13.5) B24(8.5,13.5) B25(9.5,13.5) B26(10.5,13.5) B27(11.5,13.5) B28(12.5,13.5) B29(13.5,13.5) B30(14.5,13.5) C1(-14.5,12.5) C2(-13.5,12.5) C3(-12.5,12.5) C4(-11.5,12.5) C5(-10.5,12.5) C6(-9.5,12.5) C7(-8.5,12.5) C8(-7.5,12.5) C9(-6.5,12.5) C10(-5.5,12.5) C11(-4.5,12.5) C12(-3.5,12.5) C13(-2.5,12.5) C14(-1.5,12.5) C15(-0.5,12.5) C16(0.5,12.5) C17(1.5,12.5) C18(2.5,12.5) C19(3.5,12.5) C20(4.5,12.5) C21(5.5,12.5) C22(6.5,12.5) C23(7.5,12.5) C24(8.5,12.5) C25(9.5,12.5) C26(10.5,12.5) C27(11.5,12.5) C28(12.5,12.5) C29(13.5,12.5) C30(14.5,12.5) D1(-14.5,11.5) D2(-13.5,11.5) D3(-12.5,11.5) D4(-11.5,11.5) D5(-10.5,11.5) D6(-9.5,11.5) D7(-8.5,11.5) D8(-7.5,11.5) D9(-6.5,11.5) D10(-5.5,11.5) D11(-4.5,11.5) D12(-3.5,11.5) D13(-2.5,11.5) D14(-1.5,11.5) D15(-0.5,11.5) D16(0.5,11.5) D17(1.5,11.5) D18(2.5,11.5) D19(3.5,11.5) D20(4.5,11.5) D21(5.5,11.5) D22(6.5,11.5) D23(7.5,11.5) D24(8.5,11.5) D25(9.5,11.5) D26(10.5,11.5) D27(11.5,11.5) D28(12.5,11.5) D29(13.5,11.5) D30(14.5,11.5) E1(-14.5,10.5) E2(-13.5,10.5) E3(-12.5,10.5) E4(-11.5,10.5) E5(-10.5,10.5) E6(-9.5,10.5) E7(-8.5,10.5) E8(-7.5,10.5) E9(-6.5,10.5) E10(-5.5,10.5) E11(-4.5,10.5) E12(-3.5,10.5) E13(-2.5,10.5) E14(-1.5,10.5) E15(-0.5,10.5) E16(0.5,10.5) E17(1.5,10.5) E18(2.5,10.5) E19(3.5,10.5) E20(4.5,10.5) E21(5.5,10.5) E22(6.5,10.5) E23(7.5,10.5) E24(8.5,10.5) E25(9.5,10.5) E26(10.5,10.5) E27(11.5,10.5) E28(12.5,10.5) E29(13.5,10.5) E30(14.5,10.5) F1(-14.5,9.5) F2(-13.5,9.5) F3(-12.5,9.5) F4(-11.5,9.5) F5(-10.5,9.5) F6(-9.5,9.5) F7(-8.5,9.5) F8(-7.5,9.5) F9(-6.5,9.5) F10(-5.5,9.5) F11(-4.5,9.5) F12(-3.5,9.5) F13(-2.5,9.5) F14(-1.5,9.5) F15(-0.5,9.5) F16(0.5,9.5) F17(1.5,9.5) F18(2.5,9.5) F19(3.5,9.5) F20(4.5,9.5) F21(5.5,9.5) F22(6.5,9.5) F23(7.5,9.5) F24(8.5,9.5) F25(9.5,9.5) F26(10.5,9.5) F27(11.5,9.5) F28(12.5,9.5) F29(13.5,9.5) F30(14.5,9.5) G1(-14.5,8.5) G2(-13.5,8.5) G3(-12.5,8.5) G4(-11.5,8.5) G5(-10.5,8.5) G6(-9.5,8.5) G7(-8.5,8.5) G8(-7.5,8.5) G9(-6.5,8.5) G10(-5.5,8.5) G11(-4.5,8.5) G12(-3.5,8.5) G13(-2.5,8.5) G14(-1.5,8.5) G15(-0.5,8.5) G16(0.5,8.5) G17(1.5,8.5) G18(2.5,8.5) G19(3.5,8.5) G20(4.5,8.5) G21(5.5,8.5) G22(6.5,8.5) G23(7.5,8.5) G24(8.5,8.5) G25(9.5,8.5) G26(10.5,8.5) G27(11.5,8.5) G28(12.5,8.5) G29(13.5,8.5) G30(14.5,8.5) H1(-14.5,7.5) H2(-13.5,7.5) H3(-12.5,7.5) H4(-11.5,7.5) H5(-10.5,7.5) H6(-9.5,7.5) H7(-8.5,7.5) H8(-7.5,7.5) H9(-6.5,7.5) H10(-5.5,7.5) H11(-4.5,7.5) H12(-3.5,7.5) H13(-2.5,7.5) H14(-1.5,7.5) H15(-0.5,7.5) H16(0.5,7.5) H17(1.5,7.5) H18(2.5,7.5) H19(3.5,7.5) H20(4.5,7.5) H21(5.5,7.5) H22(6.5,7.5) H23(7.5,7.5) H24(8.5,7.5) H25(9.5,7.5) H26(10.5,7.5) H27(11.5,7.5) H28(12.5,7.5) H29(13.5,7.5) H30(14.5,7.5) J1(-14.5,6.5) J2(-13.5,6.5) J3(-12.5,6.5) J4(-11.5,6.5) J5(-10.5,6.5) J6(-9.5,6.5) J7(-8.5,6.5) J8(-7.5,6.5) J9(-6.5,6.5) J10(-5.5,6.5) J11(-4.5,6.5) J12(-3.5,6.5) J13(-2.5,6.5) J14(-1.5,6.5) J15(-0.5,6.5) J16(0.5,6.5) J17(1.5,6.5) J18(2.5,6.5) J19(3.5,6.5) J20(4.5,6.5) J21(5.5,6.5) J22(6.5,6.5) J23(7.5,6.5) J24(8.5,6.5) J25(9.5,6.5) J26(10.5,6.5) J27(11.5,6.5) J28(12.5,6.5) J29(13.5,6.5) J30(14.5,6.5) K1(-14.5,5.5) K2(-13.5,5.5) K3(-12.5,5.5) K4(-11.5,5.5) K5(-10.5,5.5) K6(-9.5,5.5) K7(-8.5,5.5) K8(-7.5,5.5) K9(-6.5,5.5) K10(-5.5,5.5) K11(-4.5,5.5) K12(-3.5,5.5) K13(-2.5,5.5) K14(-1.5,5.5) K15(-0.5,5.5) K16(0.5,5.5) K17(1.5,5.5) K18(2.5,5.5) K19(3.5,5.5) K20(4.5,5.5) K21(5.5,5.5) K22(6.5,5.5) K23(7.5,5.5) K24(8.5,5.5) K25(9.5,5.5) K26(10.5,5.5) K27(11.5,5.5) K28(12.5,5.5) K29(13.5,5.5) K30(14.5,5.5) L1(-14.5,4.5) L2(-13.5,4.5) L3(-12.5,4.5) L4(-11.5,4.5) L5(-10.5,4.5) L6(-9.5,4.5) L7(-8.5,4.5) L8(-7.5,4.5) L9(-6.5,4.5) L10(-5.5,4.5) L11(-4.5,4.5) L12(-3.5,4.5) L13(-2.5,4.5) L14(-1.5,4.5) L15(-0.5,4.5) L16(0.5,4.5) L17(1.5,4.5) L18(2.5,4.5) L19(3.5,4.5) L20(4.5,4.5) L21(5.5,4.5) L22(6.5,4.5) L23(7.5,4.5) L24(8.5,4.5) L25(9.5,4.5) L26(10.5,4.5) L27(11.5,4.5) L28(12.5,4.5) L29(13.5,4.5) L30(14.5,4.5) M1(-14.5,3.5) M2(-13.5,3.5) M3(-12.5,3.5) M4(-11.5,3.5) M5(-10.5,3.5) M6(-9.5,3.5) M7(-8.5,3.5) M8(-7.5,3.5) M9(-6.5,3.5) M10(-5.5,3.5) M11(-4.5,3.5) M12(-3.5,3.5) M13(-2.5,3.5) M14(-1.5,3.5) M15(-0.5,3.5) M16(0.5,3.5) M17(1.5,3.5) M18(2.5,3.5) M19(3.5,3.5) M20(4.5,3.5) M21(5.5,3.5) M22(6.5,3.5) M23(7.5,3.5) M24(8.5,3.5) M25(9.5,3.5) M26(10.5,3.5) M27(11.5,3.5) M28(12.5,3.5) M29(13.5,3.5) M30(14.5,3.5) N1(-14.5,2.5) N2(-13.5,2.5) N3(-12.5,2.5) N4(-11.5,2.5) N5(-10.5,2.5) N6(-9.5,2.5) N7(-8.5,2.5) N8(-7.5,2.5) N9(-6.5,2.5) N10(-5.5,2.5) N11(-4.5,2.5) N12(-3.5,2.5) N13(-2.5,2.5) N14(-1.5,2.5) N15(-0.5,2.5) N16(0.5,2.5) N17(1.5,2.5) N18(2.5,2.5) N19(3.5,2.5) N20(4.5,2.5) N21(5.5,2.5) N22(6.5,2.5) N23(7.5,2.5) N24(8.5,2.5) N25(9.5,2.5) N26(10.5,2.5) N27(11.5,2.5) N28(12.5,2.5) N29(13.5,2.5) N30(14.5,2.5) P1(-14.5,1.5) P2(-13.5,1.5) P3(-12.5,1.5) P4(-11.5,1.5) P5(-10.5,1.5) P6(-9.5,1.5) P7(-8.5,1.5) P8(-7.5,1.5) P9(-6.5,1.5) P10(-5.5,1.5) P11(-4.5,1.5) P12(-3.5,1.5) P13(-2.5,1.5) P14(-1.5,1.5) P15(-0.5,1.5) P16(0.5,1.5) P17(1.5,1.5) P18(2.5,1.5) P19(3.5,1.5) P20(4.5,1.5) P21(5.5,1.5) P22(6.5,1.5) P23(7.5,1.5) P24(8.5,1.5) P25(9.5,1.5) P26(10.5,1.5) P27(11.5,1.5) P28(12.5,1.5) P29(13.5,1.5) P30(14.5,1.5) R1(-14.5,0.5) R2(-13.5,0.5) R3(-12.5,0.5) R4(-11.5,0.5) R5(-10.5,0.5) R6(-9.5,0.5) R7(-8.5,0.5) R8(-7.5,0.5) R9(-6.5,0.5) R10(-5.5,0.5) R11(-4.5,0.5) R12(-3.5,0.5) R13(-2.5,0.5) R14(-1.5,0.5) R15(-0.5,0.5) R16(0.5,0.5) R17(1.5,0.5) R18(2.5,0.5) R19(3.5,0.5) R20(4.5,0.5) R21(5.5,0.5) R22(6.5,0.5) R23(7.5,0.5) R24(8.5,0.5) R25(9.5,0.5) R26(10.5,0.5) R27(11.5,0.5) R28(12.5,0.5) R29(13.5,0.5) R30(14.5,0.5) T1(-14.5,-0.5) T2(-13.5,-0.5) T3(-12.5,-0.5) T4(-11.5,-0.5) T5(-10.5,-0.5) T6(-9.5,-0.5) T7(-8.5,-0.5) T8(-7.5,-0.5) T9(-6.5,-0.5) T10(-5.5,-0.5) T11(-4.5,-0.5) T12(-3.5,-0.5) T13(-2.5,-0.5) T14(-1.5,-0.5) T15(-0.5,-0.5) T16(0.5,-0.5) T17(1.5,-0.5) T18(2.5,-0.5) T19(3.5,-0.5) T20(4.5,-0.5) T21(5.5,-0.5) T22(6.5,-0.5) T23(7.5,-0.5) T24(8.5,-0.5) T25(9.5,-0.5) T26(10.5,-0.5) T27(11.5,-0.5) T28(12.5,-0.5) T29(13.5,-0.5) T30(14.5,-0.5) U1(-14.5,-1.5) U2(-13.5,-1.5) U3(-12.5,-1.5) U4(-11.5,-1.5) U5(-10.5,-1.5) U6(-9.5,-1.5) U7(-8.5,-1.5) U8(-7.5,-1.5) U9(-6.5,-1.5) U10(-5.5,-1.5) U11(-4.5,-1.5) U12(-3.5,-1.5) U13(-2.5,-1.5) U14(-1.5,-1.5) U15(-0.5,-1.5) U16(0.5,-1.5) U17(1.5,-1.5) U18(2.5,-1.5) U19(3.5,-1.5) U20(4.5,-1.5) U21(5.5,-1.5) U22(6.5,-1.5) U23(7.5,-1.5) U24(8.5,-1.5) U25(9.5,-1.5) U26(10.5,-1.5) U27(11.5,-1.5) U28(12.5,-1.5) U29(13.5,-1.5) U30(14.5,-1.5) V1(-14.5,-2.5) V2(-13.5,-2.5) V3(-12.5,-2.5) V4(-11.5,-2.5) V5(-10.5,-2.5) V6(-9.5,-2.5) V7(-8.5,-2.5) V8(-7.5,-2.5) V9(-6.5,-2.5) V10(-5.5,-2.5) V11(-4.5,-2.5) V12(-3.5,-2.5) V13(-2.5,-2.5) V14(-1.5,-2.5) V15(-0.5,-2.5) V16(0.5,-2.5) V17(1.5,-2.5) V18(2.5,-2.5) V19(3.5,-2.5) V20(4.5,-2.5) V21(5.5,-2.5) V22(6.5,-2.5) V23(7.5,-2.5) V24(8.5,-2.5) V25(9.5,-2.5) V26(10.5,-2.5) V27(11.5,-2.5) V28(12.5,-2.5) V29(13.5,-2.5) V30(14.5,-2.5) W1(-14.5,-3.5) W2(-13.5,-3.5) W3(-12.5,-3.5) W4(-11.5,-3.5) W5(-10.5,-3.5) W6(-9.5,-3.5) W7(-8.5,-3.5) W8(-7.5,-3.5) W9(-6.5,-3.5) W10(-5.5,-3.5) W11(-4.5,-3.5) W12(-3.5,-3.5) W13(-2.5,-3.5) W14(-1.5,-3.5) W15(-0.5,-3.5) W16(0.5,-3.5) W17(1.5,-3.5) W18(2.5,-3.5) W19(3.5,-3.5) W20(4.5,-3.5) W21(5.5,-3.5) W22(6.5,-3.5) W23(7.5,-3.5) W24(8.5,-3.5) W25(9.5,-3.5) W26(10.5,-3.5) W27(11.5,-3.5) W28(12.5,-3.5) W29(13.5,-3.5) W30(14.5,-3.5) Y1(-14.5,-4.5) Y2(-13.5,-4.5) Y3(-12.5,-4.5) Y4(-11.5,-4.5) Y5(-10.5,-4.5) Y6(-9.5,-4.5) Y7(-8.5,-4.5) Y8(-7.5,-4.5) Y9(-6.5,-4.5) Y10(-5.5,-4.5) Y11(-4.5,-4.5) Y12(-3.5,-4.5) Y13(-2.5,-4.5) Y14(-1.5,-4.5) Y15(-0.5,-4.5) Y16(0.5,-4.5) Y17(1.5,-4.5) Y18(2.5,-4.5) Y19(3.5,-4.5) Y20(4.5,-4.5) Y21(5.5,-4.5) Y22(6.5,-4.5) Y23(7.5,-4.5) Y24(8.5,-4.5) Y25(9.5,-4.5) Y26(10.5,-4.5) Y27(11.5,-4.5) Y28(12.5,-4.5) Y29(13.5,-4.5) Y30(14.5,-4.5)
  silkscreen extent -16.27,-15.5 15.5,15.5, body extent -15.5,-15.5 15.5,15.5, height 3.35
GXHT30 [mm] "SON, 8-Leads, Body 2.50x2.50mm, Pitch 0.50mm, Thermal Pad 2.00x1.49mm, IPC Medium Density"
  rect 1x1.7 smd: 0(0,0)
  rect 0.55x0.25 smd: 1(-1.175,0.75) 2(-1.175,0.25) 3(-1.175,-0.25) 4(-1.175,-0.75) 5(1.175,-0.75) 6(1.175,-0.25) 7(1.175,0.25) 8(1.175,0.75)
  silkscreen extent -1.9,-1.45 1.45,1.5, body extent -1.3,-1.3 1.3,1.3, height 1
HDR1X4 [mm] "Connector; Header; 4 Position"
  rect 1.5x1.5 hole 0.9: 1(0,0)
  round 1.5 hole 0.9: 2(2.54,0) 3(5.08,0) 4(7.62,0)
  silkscreen extent -1.27,-1.27 8.89,1.27
KZT0920309 [mm]
  rect 1.25x1 smd mask+0.051: A2(20.565,-10.16) A3(20.565,-8.89) A4(20.565,-7.62) A5(20.565,-6.35) A6(20.565,-5.08) A7(20.565,-3.81) A8(20.565,3.81) A9(20.565,5.08) A10(20.565,6.35) A11(20.565,7.62) A12(20.565,8.89) A13(20.565,10.16) C2(-20.565,10.16) C3(-20.565,8.89) C4(-20.565,7.62) C5(-20.565,6.35) C6(-20.565,5.08) C7(-20.565,3.81) C8(-20.565,-3.81) C9(-20.565,-5.08) C10(-20.565,-6.35) C11(-20.565,-7.62) C12(-20.565,-8.89) C13(-20.565,-10.16)
  rect 1x1.25 smd mask+0.051: B1(19.05,11.575) B2(17.78,11.575) B3(16.51,11.575) B4(15.24,11.575) B5(13.97,11.575) B6(12.7,11.575) B7(11.43,11.575) B8(10.16,11.575) B9(8.89,11.575) B10(7.62,11.575) B11(6.35,11.575) B12(5.08,11.575) B13(3.81,11.575) B14(2.54,11.575) B15(1.27,11.575) B16(0,11.575) B17(-1.27,11.575) B18(-2.54,11.575) B19(-3.81,11.575) B20(-5.08,11.575) B21(-6.35,11.575) B22(-7.62,11.575) B23(-8.89,11.575) B24(-10.16,11.575) B25(-11.43,11.575) B26(-12.7,11.575) B27(-13.97,11.575) B28(-15.24,11.575) B29(-16.51,11.575) D1(19.05,-11.575) D2(17.78,-11.575) D3(16.51,-11.575) D4(15.24,-11.575) D5(13.97,-11.575) D6(12.7,-11.575) D7(11.43,-11.575) D8(10.16,-11.575) D9(8.89,-11.575) D10(7.62,-11.575) D11(6.35,-11.575) D12(5.08,-11.575) D13(3.81,-11.575) D14(2.54,-11.575) D15(1.27,-11.575) D16(0,-11.575) D17(-1.27,-11.575) D18(-2.54,-11.575) D19(-3.81,-11.575) D20(-5.08,-11.575) D21(-6.35,-11.575) D22(-7.62,-11.575) D23(-8.89,-11.575) D24(-10.16,-11.575) D25(-11.43,-11.575) D26(-12.7,-11.575) D27(-13.97,-11.575) D28(-15.24,-11.575) D29(-16.51,-11.575) D30(-17.78,-11.575) D31(-19.05,-11.575)
LED1 [mil]
  round 50 hole 32: 1(-0.5,-0.5) 2(99.5,-0.5)
  silkscreen extent -126,-100 149,99
LED2 [mil]
  round 50 hole 32: 1(0,-100) 2(0,0) 3(100,-100) 4(100,0)
  silkscreen extent -60,-160 430,60
POWERPLUG1 [mil]
  round 80 hole 50: 1(0,0) 2(196.85,0)
  silkscreen extent -118,-200 315,200
S11 [mm]
  rect 1.4x2 smd: 1(0,0) 2(5.08,0) 3(5.08,4.4) 4(0,4.4)
  silkscreen extent -2.75,-0.51 6.6,4.83
SIP6 [mil]
  rect 50x50 hole 32: 1(0,0)
  round 50 hole 32: 2(100,0) 3(200,0) 4(300,0) 5(400,0) 6(500,0)
  silkscreen extent -50,-50 550,50
SMA_2 [mm]
  round 2.1 hole 1.5: 1(0,0) 2(2.5,2.5) 3(2.5,-2.5) 4(-2.5,-2.5) 5(-2.5,2.5)
  silkscreen extent -3.81,-3.81 3.81,3.81
SO3016 [mm] "SOIC, 16-Leads, Body 10.30x7.50mm, Pitch 1.27mm, IPC Medium Density"
  oval 1.85x0.6 smd: 1(-4.675,4.445) 2(-4.675,3.175) 3(-4.675,1.905) 4(-4.675,0.635) 5(-4.675,-0.635) 6(-4.675,-1.905) 7(-4.675,-3.175) 8(-4.675,-4.445) 9(4.675,-4.445) 10(4.675,-3.175) 11(4.675,-1.905) 12(4.675,-0.635) 13(4.675,0.635) 14(4.675,1.905) 15(4.675,3.175) 16(4.675,4.445)
  silkscreen extent -4.8,-5.15 3.35,5.42, body extent -3.75,-5.15 3.75,5.15, height 2.65
TE_2227023-1 [mm]
  rect 2x0.5 smd: 1(-4.1,3.4) 2(-4.1,2.6) 3(-4.1,1.8) 4(-4.1,1) 5(-4.1,0.2) 6(-4.1,-0.6) 7(-4.1,-1.4) 8(-4.1,-2.2) 9(-4.1,-3) 10(-4.1,-3.8) 11(4.1,-3.4) 12(4.1,-2.6) 13(4.1,-1.8) 14(4.1,-1) 15(4.1,-0.2) 16(4.1,0.6) 17(4.1,1.4) 18(4.1,2.2) 19(4.1,3) 20(4.1,3.8)
  round 1.358 hole 0.85: S1(-0.9,7.125)
  round 1.458 hole 0.95: S2(1.6,7.125) S3(-3.4,7.125) S4(-8.1,7.125) S5(6.2,4.8) S6(6.2,0) S7(6.2,-4.8) S8(1.6,-7.125) S9(-3.4,-7.125) S10(-8.1,-7.125)
  rect 2x2 / inner round 2 / far side rect 2x2 hole 1.05: S11(-10.9,7.125) S12(-20.9,7.125) S13(-30.9,7.125) S14(-10.9,1.45) S15(-30.9,-1.45) S16(-10.9,-3.95) S17(-25.9,-7.125) S18(-15.9,-7.125) S19(-5.9,-7.125) S20(4.1,-7.125)
  round 1.55 hole 1.55 unplated: ""(0,4.8) ""(0,-4.8)
  Keep-Out Layer region: 6.9,3.445 5.9,3.445 5.9,6.125 -8.6,6.125 -8.6,-6.125 5.9,-6.125 5.9,-3.055 6.9,-3.055 6.9,-8.125 -35.4,-8.125 -35.4,8.125 6.9,8.125
  Keep-Out Layer region: 6.9,-1.355 5.9,-1.355 5.9,1.745 6.9,1.745
  Keep-Out Layer region: 6.9,3.445 5.9,3.445 5.9,6.125 -8.6,6.125 -8.6,-6.125 5.9,-6.125 5.9,-3.055 6.9,-3.055 6.9,-8.125 -35.4,-8.125 -35.4,8.125 6.9,8.125
  Keep-Out Layer region: 6.9,-1.355 5.9,-1.355 5.9,1.745 6.9,1.745
  silkscreen extent -42.5,-7.25 7.25,7.25

## Part data
C1 C2 C3 C4 C5 C6 C7 C8 C9 C10 C11 C12 C13 C14 C15 C16 C17 C18 C19 C20 C21 C22 C23 C24 C25 C26 C27 C28 C29 C30 C31 C32 C33 C34 C35 C36 C37 C38 C39 C40 C41 C44 C45 C46 C47 C48 C49 C50 C51 C52 C55 C56 C57 C58 C59 C60 C61 C62 C63 C64 C70: library part Cap, "Capacitor", LatestRevisionDate=17-Jul-2002, LatestRevisionNote="Re-released for DXP Platform.", PackageReference=RAD-0.3, Published=8-Jun-2000, Publisher="Altium Limited"
FB1: library part FerriteBead
J1 J2 J3: "High Speed, Stacked, Multi-Port, Right Angle, Snap-Fit, Shielded, Modular Jack", PackageDocument=13-Dec-2001, ComponentLink1Description="Manufacturer Link", ComponentLink1URL=http://www.molex.com/, ComponentLink2Description=Datasheet, ComponentLink2URL=http://www.molex.com/cmc_upload/common_files/1212003_mx44520.pdf, ComponentLink3Description="Iges Model", ComponentLink3URL=http://www.molex.com/pdm_docs/igs/44520-0001_igs.zip, DatasheetDocument=13-Dec-2001, DrillSize="Nominal, Rounded to nearest 0.05mm", PackageReference=44520-0002, PCB_Layout="Complies with Manufacturer's Recommendation.", PCB_Mounting=Thru-Hole, PerformanceCategory=5, Ports=12, Positions/Loaded="All Ports - 8/8", Published=25-Jun-2002, Publisher="Altium Limited"
J4 J5: "Connector Accessories 1 Port SFP Cage Press Fit Right Angle Through Hole Nickel Tray", Package=None, Availability="In Stock", Check_prices=https://www.snapeda.com/parts/2227023-1/TE+Connectivity+AMP+Connectors/view-part/?ref=eda, EU_RoHS_Compliance=Compliant, MF="TE Connectivity", MP=2227023-1, Price=None, Product_Type=Cage, Purchase-URL=https://pricing.snapeda.com/search/part/2227023-1/?ref=eda, SnapEDA_Link=https://www.snapeda.com/parts/2227023-1/TE+Connectivity+AMP+Connectors/view-part/?ref=snap
P1: library part FPGAJTAGHEADER
R1 R2 R3 R4 R5 R6 R7 R8 R9 R10 R11 R12 R13 R14 R15 R16 R17 R21 R22 R23 R24 R25 R26 R27 R28 R29 R30 R31 R32 R33 R34 R36 R37 R38 R39 R40 R41 R42 R43 R44 R45 R47 R48 R49 R50 R54 R56 R57: library part Res, "Resistor", LatestRevisionDate=04-Mar-2005, LatestRevisionNote="PCB Footprint replaced.", PackageReference=J1-0603, Published=8-Jun-2000, Publisher="Altium Limited"
U1: "Kintex-7 FPGA, 500 User I/Os, 16 GTX, 900-Ball BGA, Speed Grade 2, Industrial Grade, Pb-Free", Generic Part Number=XC7K410T, Manufacturer=Xilinx, Code_JEDEC=MS-034-AAN-1, ComponentLink1Description=Datasheet, ComponentLink1URL=http://www.xilinx.com/support/documentation/data_sheets/ds180_7Series_Overview.pdf, ComponentLink2Description="Package Specification", ComponentLink2URL=http://www.xilinx.com/support/documentation/user_guides/ug865-Zynq-7000-Pkg-Pinout.pdf, DatasheetVersion=v1.12, GTX=16, Mounting Technology="Surface Mount", PackageDescription="Flip-Chip BGA, Body 31 x 31 mm, 1.0 mm Pitch", PackageReference=FFG900, PackageVersion="Rev 1.1", PartNumber=XC7K410T-2FFG900I, RoHS=Pb-Free, SelectIO HP=150, SelectIO HR=350, Speed Grade=-2
U4: library part OSCILLATOR
U7: "NEM&MINI Socket"
L1 L2 L3 L4 L5 L6 L7 L8 L9: Code_IEC=1005, Code_JEITA=0402, LatestRevisionDate=17-Jul-2002, LatestRevisionNote="Re-released for DXP Platform.", PackageReference=0402-A, Published=8-Jun-2000, Publisher="Altium Limited"

## Free pads (board coordinates)
  oct 160x160 hole 106: 0(590.55,590.55) 0(590.55,3740.16) 0(590.55,6889.76) 0(787.4,1181.1) 0(2559.06,4527.56) 0(10433.07,4527.56) 0(12204.72,1181.1) 0(12401.57,590.55) 0(12401.57,3740.16) 0(12401.57,6889.76)
  round 120 hole 80: 2(11587.85,6871) 3(11391,6871)
  round 60 hole 30: 4(7403,5014) 5(7403,4923) 6(7601,5014) 7(7724,4924) 8(7751,5014) 9(7892,4957) 10(10228,3457) 11(10228,3367) 12(10378,3458) 13(10378,3366) 14(10528,3457) 15(10528,3367)

## Via types
v1: diameter 14, hole 8, Top Layer to Bottom Layer, 811 vias
v2: diameter 50, hole 28, Top Layer to Bottom Layer, 26 vias
v3: diameter 20, hole 10, Top Layer to Bottom Layer, 9 vias